# EAGLE board superH_rev4_release (EAGLE 7.6.0), part 1 of 3
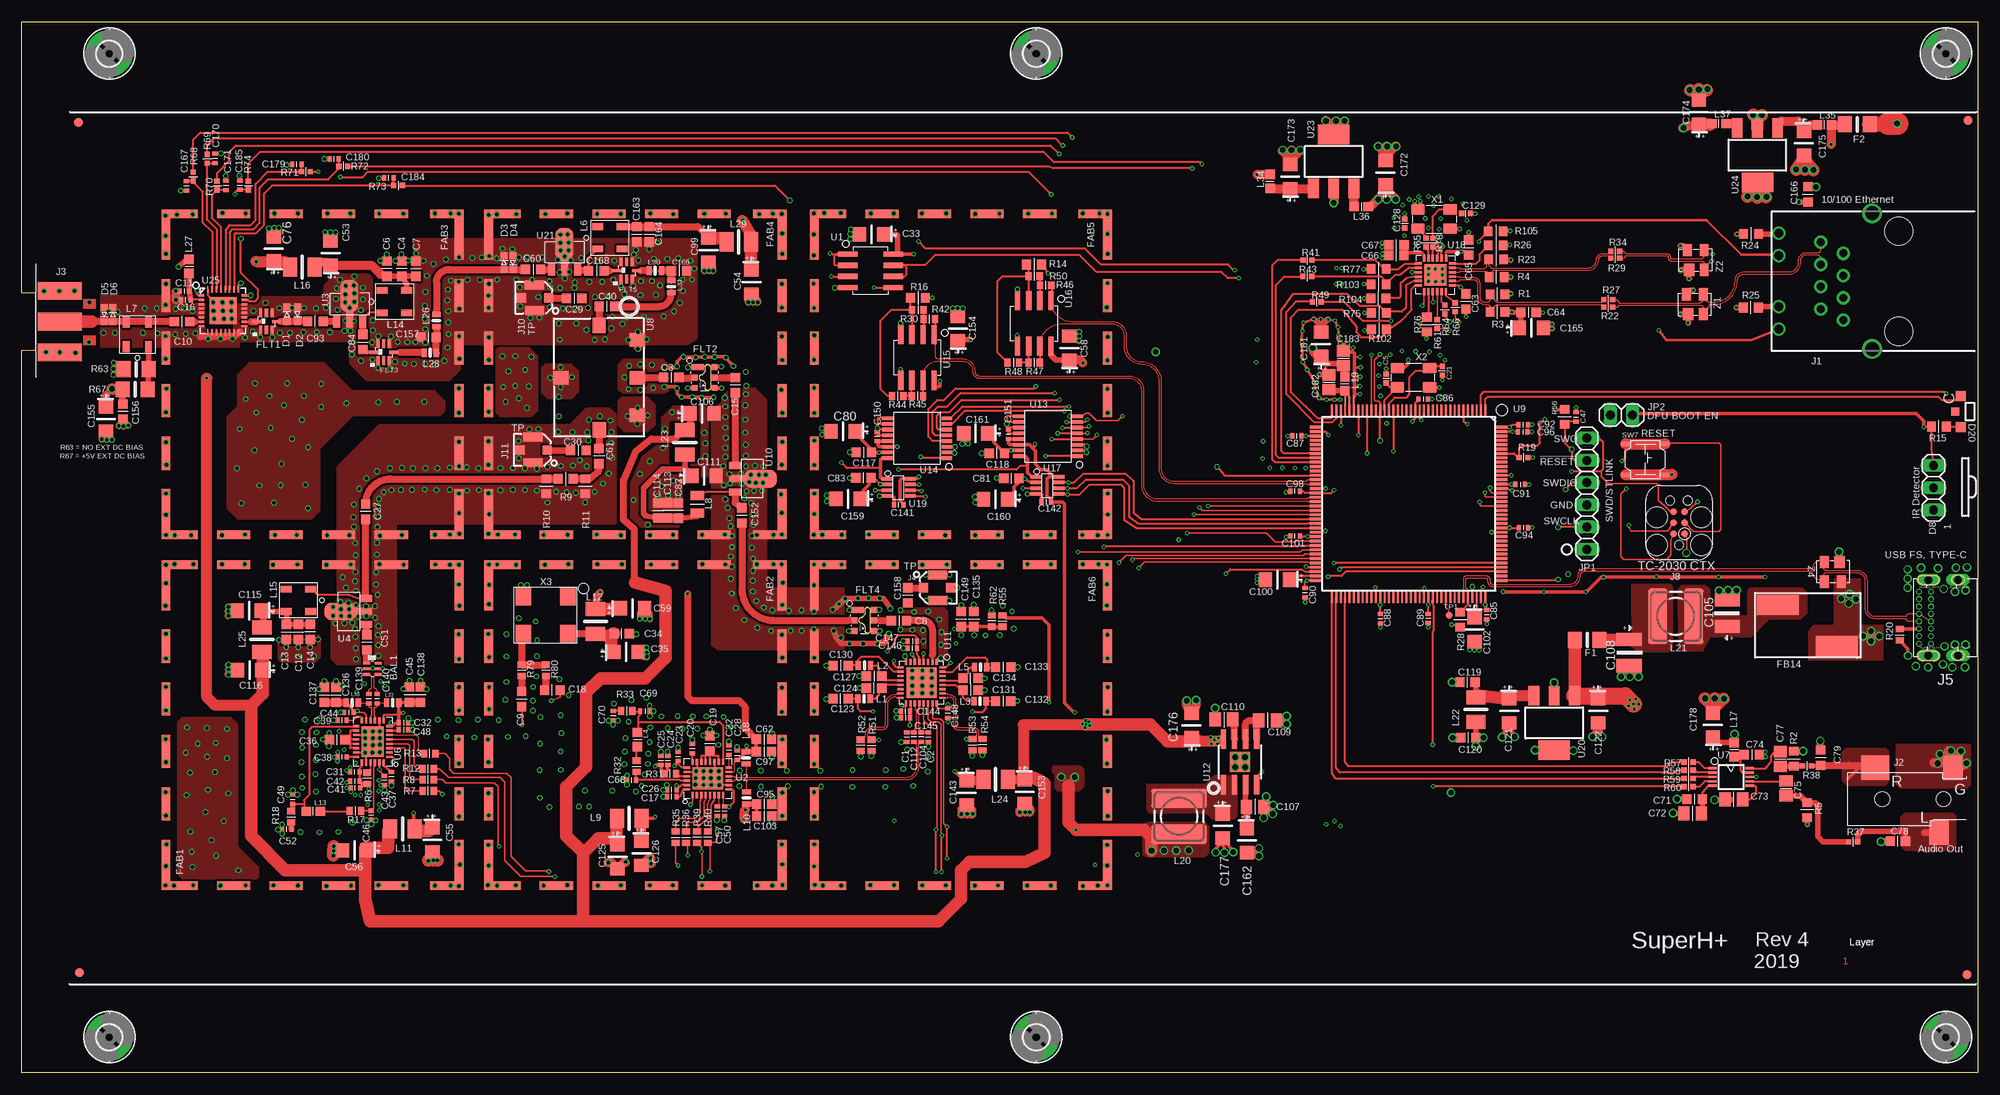
[diagram p0: board, top side]
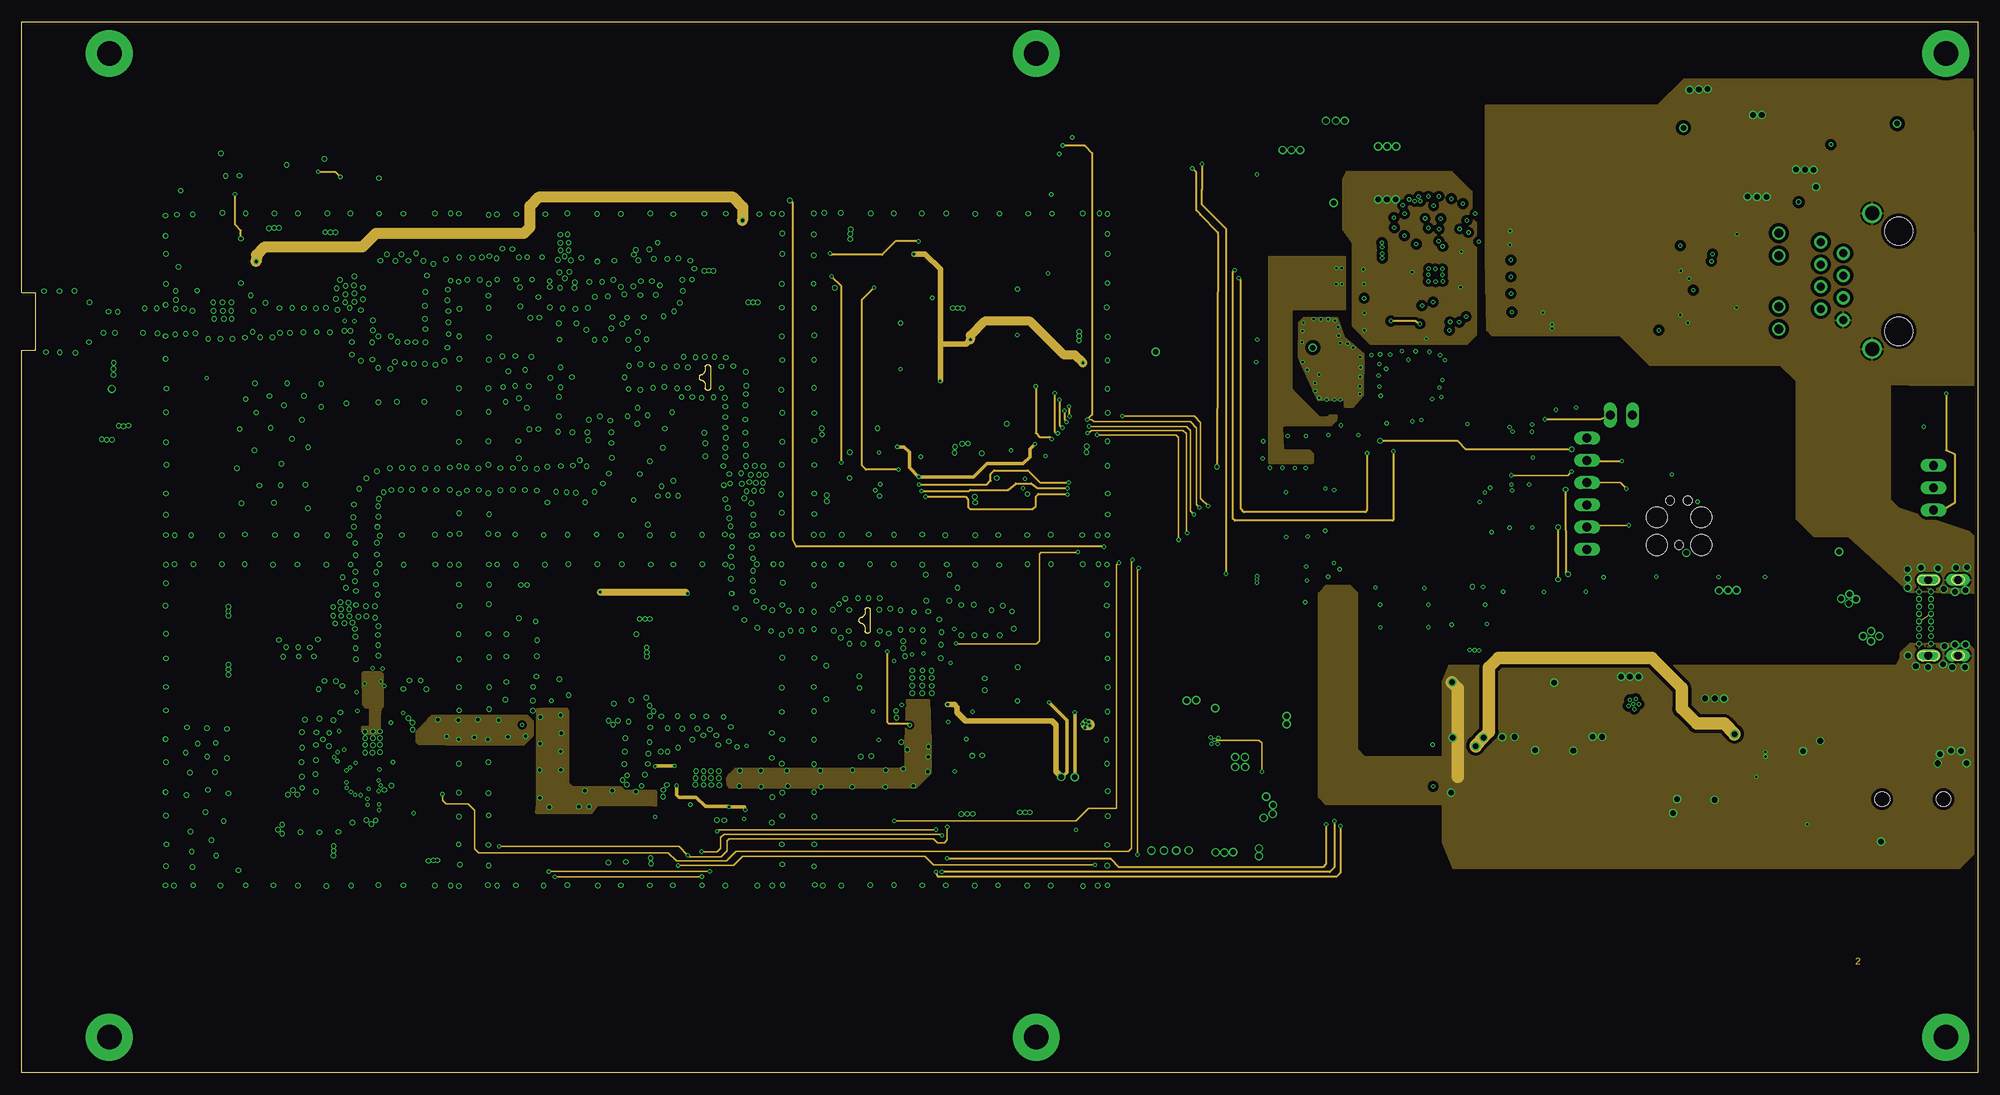
[diagram p1: board, inner layer Route2]
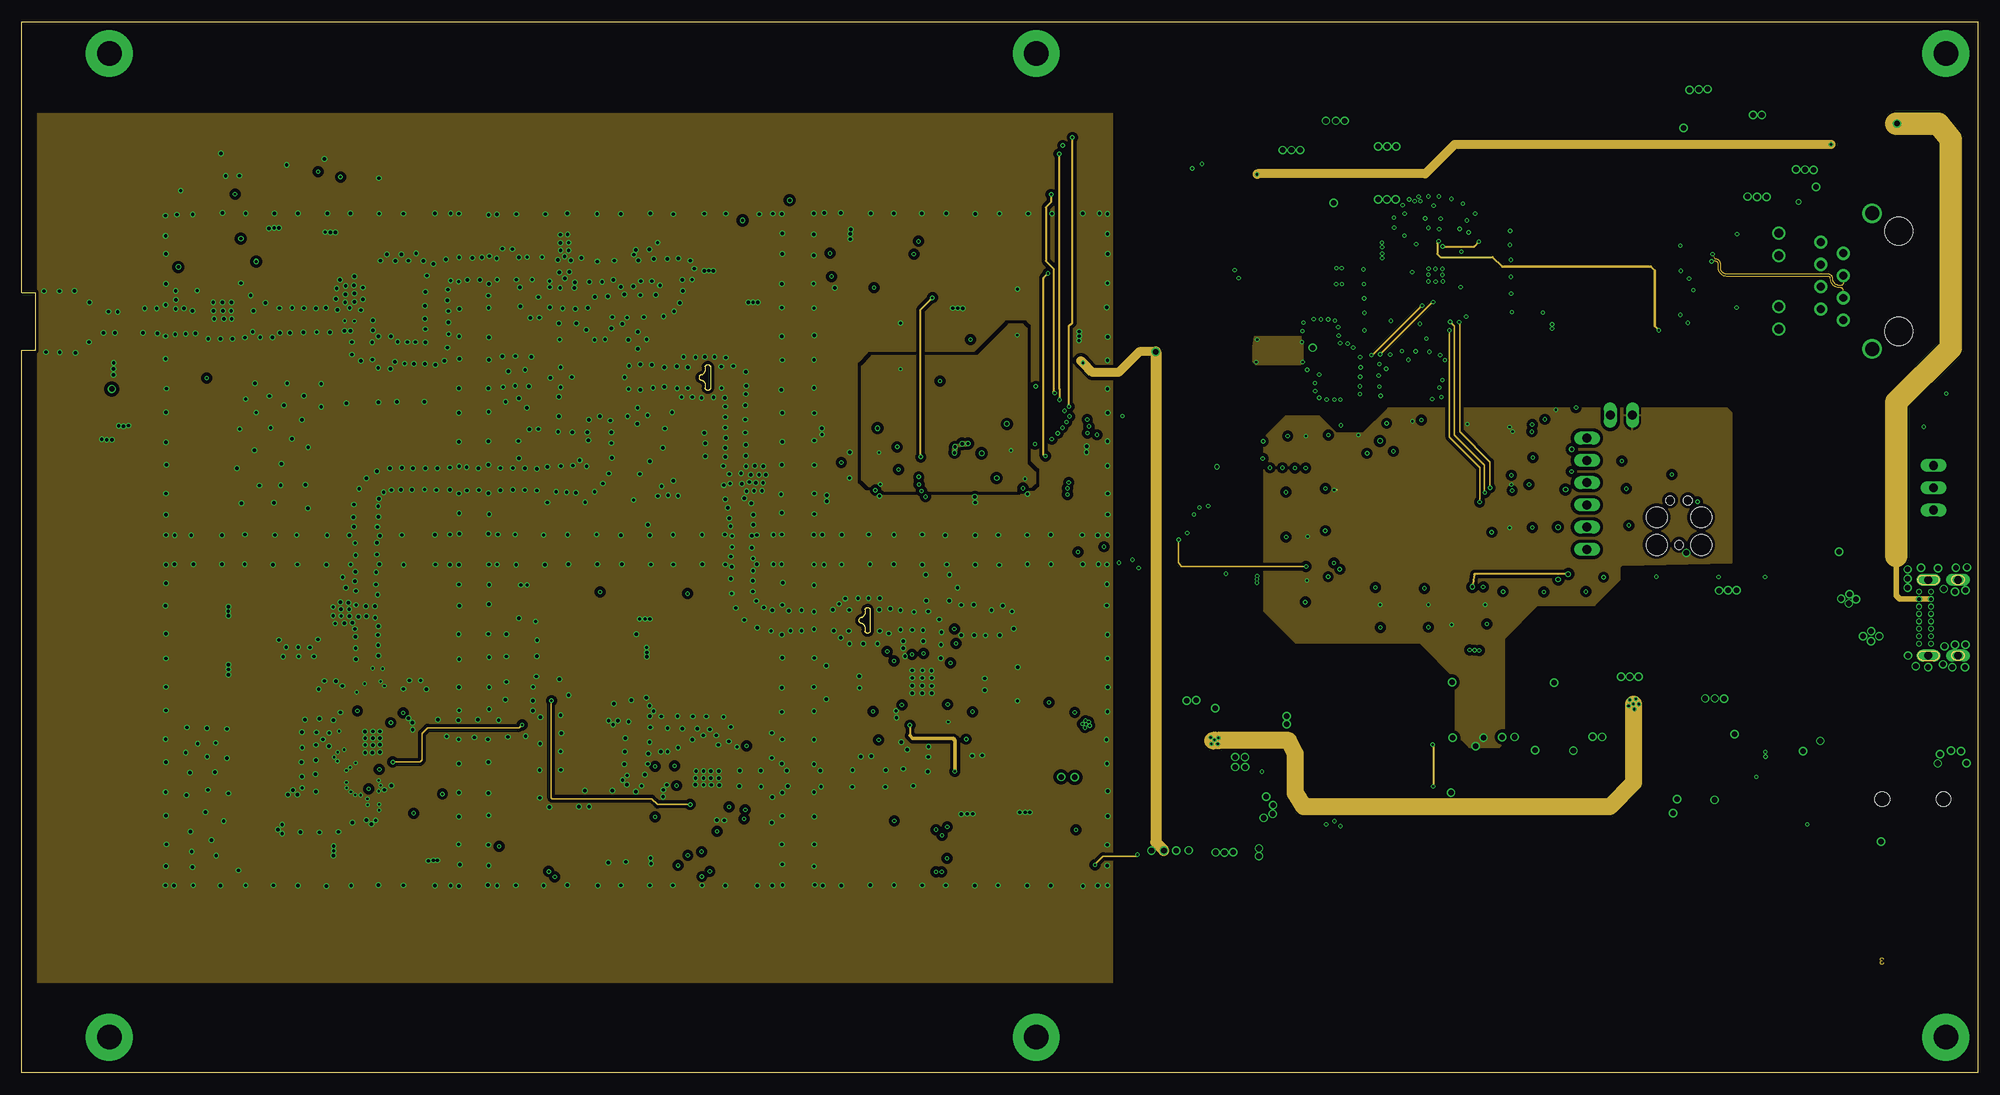
[diagram p2: board, inner layer Route3]
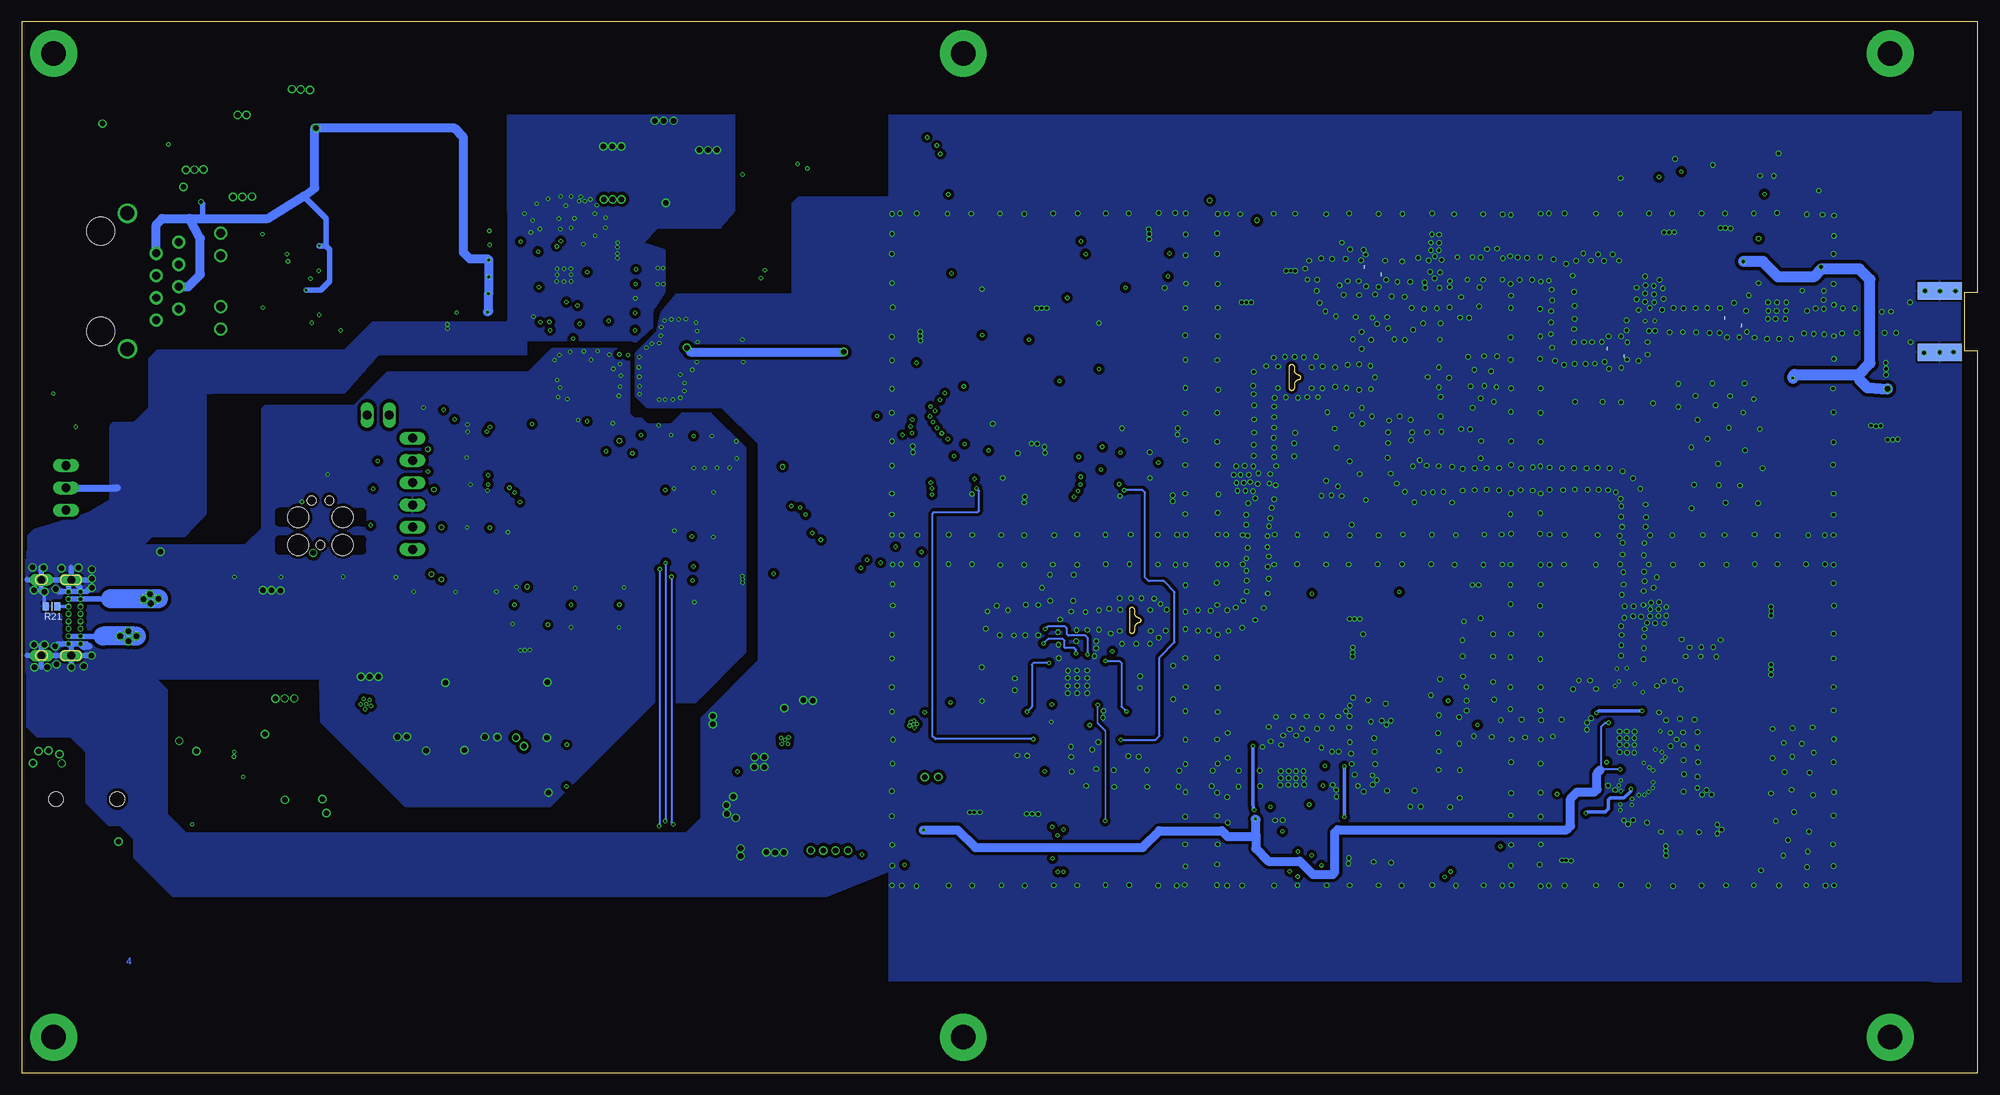
[diagram p3: board, bottom side, seen from below]

Size 223.26 x 120 mm. Coordinates in mm from the lower left corner, seen from the top.
Outline: 0,120 223.26,120 223.26,0 0,0 0,82.47 1.55,82.47 1.55,89.08 0,89.08 0,120
Copper layers (1+2+3+16): Top 0.035mm / dielectric 0.2mm / Route2 0.035mm / dielectric 0.15mm / Route3 0.035mm / dielectric 0.2mm / Bottom 0.035mm
Design rules "default *": minimum track width 5mil, minimum drill 10mil, track to track 5mil, track to pad 5mil, pad to pad 5mil, via to via 5mil, smd to smd 0mil, copper to edge 10mil, drill to drill 10mil, minimum pad ring 4.5mil, minimum via ring 4.5mil, stop-mask expansion 0mil, vias tented up to drill 50mil, thermal gap 10mil
Net classes: 1 differential: width 0.127 mm, clearance 0.127 mm
tRestrict: area 42,86.1 to 43.1,89.7; area 40.5,87.4 to 44.6,88.8; area 62.7,87.9 to 63.3,89; area 58,91.2 to 58.7,92.3; area 80.9,78.2 to 82,78.8; area 73.8,78.9 to 74.4,80; area 38.7,63.8 to 39.8,64.5; area 65.4,70.1 to 66.5,70.7; area 61.7,67.3 to 62.4,68.4; area 30.8,52.1 to 32.3,55.9; area 29.5,53.1 to 33.8,54.8; area 63.2,70.6 to 63.9,71.6; 43 more areas
bRestrict: area 5.5,109.8 to 223.1,118.6; area 5.4,1.2 to 223,10

## Footprints (pad centres in the part's own frame; a part is rotated, then mirrored left to right if it is on the bottom)
TDK_BALUN_5PIN = smd 0.3 x 0.8: 1 -0.635,-0.66; 2 0.015,-0.66; 3 0.665,-0.66; 4 0.665,0.64; 5 0.015,0.64; 6 -0.635,0.64
C0402 = smd 0.457 x 0.61: 1 -0.549,0; 2 0.524,0
C0603 = smd 1.05 x 1.08: 1 -0.875,0; 2 0.875,0
C0402' = smd 0.6 x 0.6: 1 -0.5,0; 2 0.501,0
1210K = smd 1.5 x 1.651: A -1.119,0; C 1.627,0
0402 = smd 0.457 x 0.61: 1 -0.524,0; 2 0.549,0
C0805 = smd 1.3 x 1.6: 1 -1,0; 2 1,0
C0805' = smd 1.3 x 1.5: 1 -0.85,0; 2 0.85,0
1210K' = smd 1.5 x 2.9: A -1.5,0; C 1.5,0
SC-79_PINDIODE = smd 0.813 x 0.813: A -0.813,-0.025; C 0.787,-0.025
1X03 = drill 1.016 long: 1 -2.54,0; 2 0,0; 3 2.54,0
LED-APA3010_1PRIMARY = smd 1.143 x 1.143: 1 -1.854,-0.051; 2 1.651,-0.051 | smd 0.889 x 0.889: 3 -0.102,-0.711
R1206 = smd 1.6 x 1.803: 1 -1.422,0; 2 1.422,0
RF_SHIELD = smd 5.72 x 1: P$1 -15.56,-16.51; P$6 16.36,-16.51; P$7 -15.56,16.97; P$12 16.36,16.97 | smd 3.8 x 1: P$2 -8.59,-16.51; P$3 -2.59,-16.51; P$4 3.41,-16.51; P$5 9.41,-16.51; P$8 -8.59,16.97; P$9 -2.59,16.97; P$10 3.41,16.97; P$11 9.41,16.97 | smd 1 x 3.14: P$13 -17.92,-14.44; P$19 18.72,-14.44 | smd 1 x 3.8: P$14 -17.92,-8.77; P$15 -17.92,-2.77; P$16 -17.92,3.23; P$17 -17.92,9.23; P$20 18.72,-8.77; P$21 18.72,-2.77; P$22 18.72,3.23; P$23 18.72,9.23 | smd 1 x 2.8: P$18 -17.92,15.07; P$24 18.72,15.07
SMB2.5-2 = smd 4.8 x 2.3: P$1 -3.364,2.416; P$2 3.336,-2.284
FIDUCIAL = smd 1.016 x 1.016: 1 0,0
LPF_0868LP15A020 = smd 0.35 x 1: 1 0.7,0.9; 2 0.05,0.9; 3 -0.6,0.9; 5 -0.6,-1.05; 6 0.05,-1.05; 7 0.7,-1.05 | smd 1 x 0.35: 4 -1.1,-0.05; 8 1.2,-0.05
SM3030-6 = smd 1.5 x 0.6: 1 -0.725,1.175 | smd 0.75 x 0.6: 2 -1.1,-0.025; 3 -1.1,-1.2; 4 1.15,-1.2; 5 1.15,-0.025; 6 1.15,1.175
2,8-PAD = drill 2.8 pad 5.334: B2,8 0,0
SI-50170 = drill 0.9 pad 1.5: 1 4.445,5.842; 2 3.175,3.302; 3 1.905,5.842; 4 0.635,3.302; 5 -0.635,5.842; 6 -1.905,3.302; 7 -3.175,5.842; 8 -4.445,3.302 | drill 1.016 pad 1.5: A1 -5.461,10.668; A2 2.921,10.668; C1 -2.921,10.668; C2 5.461,10.668 | drill 1.6 pad 2.2: S1 -7.747,0; S2 7.747,0 | hole 3.251: -5.715,-3.048; 5.715,-3.048
SJ-3523 = smd 2.2 x 2.8: G 8.1,3.6; L 6.5,-3.8 | smd 3.2 x 2.8: R -0.8,3.6 | hole 1.7: 0,0; 7,0
SMA_EDGE = smd 2 x 5: GND@1 8,0; GND@3 1,0 | smd 2 x 5 bottom: GND@2 8,0; GND@4 1,0 | smd 2.1 x 5: RF 4.5,0
UFLCONNECTOR = smd 2.2 x 1: 1 0.01,-1.46; 2 -0.01,1.46 | smd 1.05 x 1.05: 3 -1.5,0; RF 1.6,0
GCT_PN_USB4085 = drill 0.4 pad 0.65: A1 -3,2.812; A4 -2.15,2.812; A5 -1.3,2.812; A6 -0.45,2.812; A7 0.4,2.812; A8 1.25,2.812; A9 2.1,2.812; A12 2.95,2.812; B1 2.95,1.458; B4 2.1,1.458; B5 1.25,1.458; B6 0.4,1.458; B7 -0.45,1.458; B8 -1.3,1.458; B9 -2.15,1.458; B12 -2.995,1.46 | drill 0.9 long: GND@1 -4.35,1.75; GND@2 -4.35,-1.63; GND@3 4.3,1.75; GND@4 4.3,-1.63
TC2030-IDC = smd 0.787 x 0.787: 1 -1.27,-0.635; 2 -1.27,0.635; 3 0,-0.635; 4 0,0.635; 5 1.27,-0.635; 6 1.27,0.635 | hole 2.375: -2.54,2.54; 0.635,2.54; 0.635,-2.54; -2.54,-2.54 | hole 1.016: -2.54,0; 2.54,1.016; 2.54,-1.016
1X06 = drill 1.016 long: 1 -6.35,0; 2 -3.81,0; 3 -1.27,0; 4 1.27,0; 5 3.81,0; 6 6.35,0
1X02 = drill 1.016 long: 1 -1.27,0; 2 1.27,0
MURATA_LQW_0603 = smd 0.6 x 1: 1 -0.7,0; 2 0.7,0
0603 = smd 1.067 x 1.067: 1 -0.9,0; 2 0.7,0
TCCH-80+ = smd 0.762 x 1.27: 1 -1.27,1.524; 2 1.27,1.524; 3 1.27,-1.27; 4 -1.27,-1.27
L2012C = smd 1 x 1.55: 1 -1,0; 2 1,0
L3225M = smd 1.6 x 2.2: 1 -1.4,0; 2 1.4,0
POWER-CHOKE_WE-TPC = smd 6.3 x 2.2: 1 0,2.05; 2 0,-2.05
R0603 = smd 1 x 1.1: 1 -0.85,0; 2 0.85,0
R0402 = smd 0.7 x 0.9: 1 -0.65,0; 2 0.65,0
R0603_COMPACT = smd 0.7 x 0.9: 1 -0.65,0; 2 0.65,0
R0402' = smd 0.6 x 0.6: 1 -0.5,0; 2 0.5,0
PBUT_SW_TACTILE_4_5MMX4_5MM = smd 1 x 0.5: 1 -2.2,1.7; 2 2.3,1.7; 3 -2.2,-1.8; 4 2.3,-1.8
TP08R = smd 0.8 x 0.8: TP 0,0
SO08 = smd 0.6 x 2.2: 1 -1.905,-2.6; 2 -0.635,-2.6; 3 0.635,-2.6; 4 1.905,-2.6; 5 1.905,2.6; 6 0.635,2.6; 7 -0.635,2.6; 8 -1.905,2.6
QFN28_NONSQ = smd 0.25 x 0.7: 1 -1.75,-1.9; 2 -1.25,-1.9; 3 -0.75,-1.9; 4 -0.25,-1.9; 5 0.25,-1.9; 6 0.75,-1.9; 7 1.25,-1.9; 8 1.75,-1.9; 15 1.75,1.9; 16 1.25,1.9; 17 0.75,1.9; 18 0.25,1.9; 19 -0.25,1.9; 20 -0.75,1.9; 21 -1.25,1.9; 22 -1.75,1.9 | smd 0.7 x 0.25: 9 2.4,-1.25; 10 2.4,-0.75; 11 2.4,-0.25; 12 2.4,0.25; 13 2.4,0.75; 14 2.4,1.25; 23 -2.4,1.25; 24 -2.4,0.75; 25 -2.4,0.25; 26 -2.4,-0.25; 27 -2.4,-0.75; 28 -2.4,-1.25 | smd 3.5 x 2.5: GPAD 0,0
SOT89 = smd 0.8 x 1.4: 1 -1.474,-2.768; 3 1.524,-2.768 | smd 0.8 x 1.9: 2 0.025,-2.514 | smd 2.032 x 3.65: 2@1 0.025,0.153
MSOP10 = smd 0.25 x 1: 1 -1,-2.113; 2 -0.5,-2.113; 3 0,-2.113; 4 0.5,-2.113; 5 1,-2.113; 6 1,2.113; 7 0.5,2.113; 8 0,2.113; 9 -0.5,2.113; 10 -1,2.113
SYM-18H = smd 1.778 x 1.524: 1 5.969,0.025; 2 -5.969,0 | smd 1.524 x 1.778: 3 0,-4.369; 4 0,4.394; 5 -4.318,-4.369; 6 4.318,-4.369
STM32F407_144 = smd 1.35 x 0.32: 1 -10.625,8.75; 2 -10.625,8.25; 3 -10.625,7.75; 4 -10.625,7.25; 5 -10.625,6.75; 6 -10.625,6.25; 7 -10.625,5.75; 8 -10.625,5.25; 9 -10.625,4.75; 10 -10.625,4.25; 11 -10.625,3.75; 12 -10.625,3.25; 13 -10.625,2.75; 14 -10.625,2.25; 15 -10.625,1.75; 16 -10.625,1.25; 17 -10.625,0.75; 18 -10.625,0.25; 19 -10.625,-0.25; 20 -10.625,-0.75; 21 -10.625,-1.25; 22 -10.625,-1.75; 23 -10.625,-2.25; 24 -10.625,-2.75; 25 -10.625,-3.25; 26 -10.625,-3.75; 27 -10.625,-4.25; 28 -10.625,-4.75; 29 -10.625,-5.25; 30 -10.625,-5.75; 31 -10.625,-6.25; 32 -10.625,-6.75; 33 -10.625,-7.25; 34 -10.625,-7.75; 35 -10.625,-8.25; 36 -10.625,-8.75; 73 10.625,-8.75; 74 10.625,-8.25; 75 10.625,-7.75; 76 10.625,-7.25; 77 10.625,-6.75; 78 10.625,-6.25; 79 10.625,-5.75; 80 10.625,-5.25; 81 10.625,-4.75; 82 10.625,-4.25; 83 10.625,-3.75; 84 10.625,-3.25; 85 10.625,-2.75; 86 10.625,-2.25; 87 10.625,-1.75; 88 10.625,-1.25; 89 10.625,-0.75; 90 10.625,-0.25; 91 10.625,0.25; 92 10.625,0.75; 93 10.625,1.25; 94 10.625,1.75; 95 10.625,2.25; 96 10.625,2.75; 97 10.625,3.25; 98 10.625,3.75; 99 10.625,4.25; 100 10.625,4.75; 101 10.625,5.25; 102 10.625,5.75; 103 10.625,6.25; 104 10.625,6.75; 105 10.625,7.25; 106 10.625,7.75; 107 10.625,8.25; 108 10.625,8.75 | smd 0.32 x 1.35: 37 -8.75,-10.625; 38 -8.25,-10.625; 39 -7.75,-10.625; 40 -7.25,-10.625; 41 -6.75,-10.625; 42 -6.25,-10.625; 43 -5.75,-10.625; 44 -5.25,-10.625; 45 -4.75,-10.625; 46 -4.25,-10.625; 47 -3.75,-10.625; 48 -3.25,-10.625; 49 -2.75,-10.625; 50 -2.25,-10.625; 51 -1.75,-10.625; 52 -1.25,-10.625; 53 -0.75,-10.625; 54 -0.25,-10.625; 55 0.25,-10.625; 56 0.75,-10.625; 57 1.25,-10.625; 58 1.75,-10.625; 59 2.25,-10.625; 60 2.75,-10.625; 61 3.25,-10.625; 62 3.75,-10.625; 63 4.25,-10.625; 64 4.75,-10.625; 65 5.25,-10.625; 66 5.75,-10.625; 67 6.25,-10.625; 68 6.75,-10.625; 69 7.25,-10.625; 70 7.75,-10.625; 71 8.25,-10.625; 72 8.75,-10.625; 109 8.75,10.625; 110 8.25,10.625; 111 7.75,10.625; 112 7.25,10.625; 113 6.75,10.625; 114 6.25,10.625; 115 5.75,10.625; 116 5.25,10.625; 117 4.75,10.625; 118 4.25,10.625; 119 3.75,10.625; 120 3.25,10.625; 121 2.75,10.625; 122 2.25,10.625; 123 1.75,10.625; 124 1.25,10.625; 125 0.75,10.625; 126 0.25,10.625; 127 -0.25,10.625; 128 -0.75,10.625; 129 -1.25,10.625; 130 -1.75,10.625; 131 -2.25,10.625; 132 -2.75,10.625; 133 -3.25,10.625; 134 -3.75,10.625; 135 -4.25,10.625; 136 -4.75,10.625; 137 -5.25,10.625; 138 -5.75,10.625; 139 -6.25,10.625; 140 -6.75,10.625; 141 -7.25,10.625; 142 -7.75,10.625; 143 -8.25,10.625; 144 -8.75,10.625
QFN32 = smd 0.25 x 0.7: 1 -1.75,-2.38; 2 -1.25,-2.38; 3 -0.75,-2.38; 4 -0.25,-2.38; 5 0.25,-2.38; 6 0.75,-2.38; 7 1.25,-2.38; 8 1.75,-2.38; 17 1.75,2.39; 18 1.25,2.39; 19 0.75,2.39; 20 0.25,2.39; 21 -0.25,2.39; 22 -0.75,2.39; 23 -1.25,2.39; 24 -1.75,2.39 | smd 0.7 x 0.25: 9 2.4,-1.75; 10 2.4,-1.25; 11 2.4,-0.75; 12 2.4,-0.25; 13 2.4,0.25; 14 2.4,0.75; 15 2.4,1.25; 16 2.4,1.75; 25 -2.4,1.75; 26 -2.4,1.25; 27 -2.4,0.75; 28 -2.4,0.25; 29 -2.4,-0.25; 30 -2.4,-0.75; 31 -2.4,-1.25; 32 -2.4,-1.75 | smd 3.45 x 3.45: GPAD 0,0
SO8 = smd 0.6 x 2.2: 1 -1.905,-2.62; 2 -0.635,-2.62; 3 0.635,-2.62; 4 1.905,-2.62; 5 1.905,2.58; 6 0.635,2.58; 7 -0.635,2.58; 8 -1.905,2.58 | smd 2.29 x 2.29: GPAD 0,0
SSOP16 = smd 0.42 x 1.25: 1 -2.25,-3.35; 2 -1.6,-3.35; 3 -0.95,-3.35; 4 -0.3,-3.35; 5 0.35,-3.35; 6 1,-3.35; 7 1.65,-3.35; 8 2.3,-3.35; 9 2.3,3.394; 10 1.65,3.394; 11 1,3.394; 12 0.35,3.394; 13 -0.3,3.394; 14 -0.95,3.394; 15 -1.6,3.394; 16 -2.25,3.394
TSOT-23-8 = smd 0.4 x 1.22: 1 -1,-1.3; 2 -0.35,-1.3; 3 0.3,-1.3; 4 0.95,-1.3; 5 0.95,1.35; 6 0.3,1.35; 7 -0.35,1.35; 8 -1,1.35
QFN-24 = smd 0.28 x 0.8: 1 -1.205,-1.836; 2 -0.705,-1.836; 3 -0.205,-1.836; 4 0.295,-1.836; 5 0.795,-1.836; 6 1.295,-1.836; 13 1.3,2.03; 14 0.8,2.03; 15 0.3,2.03; 16 -0.2,2.03; 17 -0.7,2.03; 18 -1.2,2.03 | smd 0.8 x 0.28: 7 1.94,-1.191; 8 1.94,-0.691; 9 1.94,-0.191; 10 1.94,0.309; 11 1.94,0.809; 12 1.94,1.309; 19 -1.929,1.3; 20 -1.929,0.8; 21 -1.929,0.3; 22 -1.929,-0.2; 23 -1.929,-0.7; 24 -1.929,-1.2 | smd 2.5 x 2.5: GP 0,0.1
SOT223 = smd 1.219 x 2.235: 1 -2.311,-3.099; 2 0,-3.099; 3 2.311,-3.099 | smd 3.6 x 2.2: 4 0,3.099
QFN32' = smd 0.7 x 0.25: 1 -2.473,1.795; 2 -2.473,1.295; 3 -2.473,0.795; 4 -2.473,0.295; 5 -2.473,-0.205; 6 -2.473,-0.705; 7 -2.473,-1.205; 8 -2.473,-1.705; 17 2.427,-1.705; 18 2.427,-1.205; 19 2.427,-0.705; 20 2.427,-0.205; 21 2.427,0.295; 22 2.427,0.795; 23 2.427,1.295; 24 2.427,1.795 | smd 0.25 x 0.7: 9 -1.773,-2.405; 10 -1.273,-2.405; 11 -0.773,-2.405; 12 -0.273,-2.405; 13 0.227,-2.405; 14 0.727,-2.405; 15 1.227,-2.405; 16 1.727,-2.405; 25 1.727,2.495; 26 1.227,2.495; 27 0.727,2.495; 28 0.227,2.495; 29 -0.273,2.495; 30 -0.773,2.495; 31 -1.273,2.495; 32 -1.773,2.495 | smd 3.1 x 3.1: 33 -0.023,0.045
ECS-250-20-30B-DU_CRYSTAL = smd 1.6 x 1.25: 1 -1.9,-1.1; 3 1.8,1.1; GND@1 -1.9,1.1; GND@2 1.8,-1.1
CWX8XX_5MM_7MM = smd 1.8 x 2: 1 -2.5,-2.1; 2 2.58,-2.1; 3 2.58,2.1; 4 -2.5,2.1
SR2.8.TCT_1PRIMARY = smd 1.397 x 1.194: 1 -1.168,0.813 | smd 1.397 x 0.991: 2 -1.168,-0.914; 3 1.067,-0.914; 4 1.067,1.016

## Placement (x,y rotation side)
BAL1  HHM17147A1  [TDK_BALUN_5PIN]  40,46.15 270 top
C1  DNP  [C0402]  101.02,38.33 90 top
C2  DNP  [C0402]  103.48,38.33 90 top
C3  330pF  [C0603]  74.12,79.4 0 top
C4  1000pF  [C0603]  43.36,91.82 270 top
C5  10pF  [C0402']  155.75,79.27 270 top
C6  18pF  [C0603]  41.68,91.82 270 top
C7  2.2uF  [C0603]  44.98,91.82 90 top
C8  330pF  [C0603]  100.13,51.64 0 top
C9  1uF  [C0603]  57.05,42.67 90 top
C10  1000pF  [C0603]  18.29,85.78 180 top
C11  0.1uF  [C0402]  18.57,89.26 180 top
C12  1000pF  [C0603]  31.55,50.34 90 top
C13  330pF  [C0603]  30.2,50.34 90 top
C14  2.2uF  [C0603]  32.92,50.34 270 top
C15  330pF  [C0603]  81.43,78.51 270 top
C16  1000pF  [C0402]  18.69,88.27 180 top
C17  1uF  [C0402]  74.17,31.52 180 top
C18  1uF  [C0603]  60.55,43.71 180 top
C19  2.2uF  [C0603]  78.54,37.62 90 top
C20  1uF  [C0402]  76.56,37.03 90 top
C21  10pF  [C0402']  162.15,80.16 90 top
C22  1uF  [C0402]  80.7,36.86 90 top
C23  0.012uF  [C0402]  74.9,36.15 90 top
C24  18pF  [C0402]  73.74,35.69 90 top
C25  1uF  [C0402]  72.95,35.69 90 top
C26  0.1uF  [C0402]  74.17,32.34 180 top
C27  330pF  [C0603]  39.24,64.09 270 top
C28  0.012uF  [C0402]  81.66,36.27 90 top
C29  DNP  [C0603]  63.04,88.44 0 top
C30  DNP  [C0603]  63.53,71.07 0 top
C31  0.012uF  [C0402]  38,34.37 180 top
C32  0.1uF  [C0402]  43.59,39.98 0 top
C33  TLJA107M006R0500_100uF_6.3V  [1210K]  97.26,95.73 180 top
C34  330pF  [C0603]  68.48,50.14 180 top
C35  TLJA107M006R0500_100uF_6.3V  [1210K]  68.71,48.06 0 top
C36  2.2uF  [C0603]  35.99,38.05 180 top
C37  1uF  [C0402]  42.19,33.81 270 top
C38  1uF  [C0402]  36.55,36.07 180 top
C39  1uF  [C0402]  36.55,40.26 180 top
C40  1000pF  [C0603]  66.78,87.5 0 top
C41  18pF  [C0402]  38.05,32.54 180 top
C42  1uF  [C0402]  38.02,33.3 180 top
C43  0.1uF  [C0402]  41.4,33.38 270 top
C44  0.012uF  [C0402]  37.34,41.15 180 top
C45  1uF  [C0603]  44.22,43.18 90 top
C46  120pF  [C0402]  39.88,29.39 270 top
C47  1uF  [0402]  177.42,74.88 90 top
C48  0.1uF  [C0402]  43.59,39.17 0 top
C49  120pF  [C0402]  30.91,31.24 90 top
C50  0.1uF  [C0402]  80.21,29.85 270 top
C51  330pF  [C0603]  39.37,49.15 270 top
C52  470pF  [C0402]  30.23,27.81 180 top
C53  TLJA107M006R0500_100uF_6.3V  [1210K]  35.24,93.33 90 top
C54  TLJA107M006R0500_100uF_6.3V  [1210K]  83.29,90.55 270 top
C55  TLJA107M006R0500_100uF_6.3V  [1210K]  46.86,26.87 270 top
C56  TLJA107M006R0500_100uF_6.3V  [1210K]  38.25,25.4 180 top
C57  0.1uF  [C0402]  79.38,29.85 270 top
C58  TLJA107M006R0500_100uF_6.3V  [1210K]  119.58,82.5 90 top
C59  TLJA107M006R0500_100uF_6.3V  [1210K]  69.47,53.04 0 top
C60  1000pF  [C0603]  58.34,91.72 0 top
C61  330pF  [C0603]  65.89,70.41 270 top
C62  2.2uF  [C0603]  84.71,38.08 0 top
C63  0.1uF  [C0603]  164.85,88.06 270 top
C64  0.1uF  [C0603]  171.98,86.82 0 top
C65  0.1uF  [C0603]  165.18,94.23 90 top
C66  1uF  [C0603]  156.9,93.32 180 top
C67  330pF  [C0603]  156.92,94.51 180 top
C68  120pF  [C0402]  69.6,33.43 180 top
C69  120pF  [C0402]  71.12,41.28 0 top
C70  470pF  [C0402]  67.54,40.77 270 top
C71  0.1uF  [C0603]  190.96,31.27 180 top
C72  10uF  [C0805]  190.73,29.64 180 top
C73  10uF  [C0805]  195.43,31.22 0 top
C74  0.1uF  [C0603]  197.49,36.32 0 top
C75  2.2uF  [C0805']  201.4,32.49 90 top
C76  TLJA107M006R0500_100uF_6.3V  [1210K]  28.75,93.83 90 top
C77  2.2uF  [C0805']  200.76,35.84 90 top
C78  8200pF  [C0603]  214.17,26.44 180 top
C79  8200pF  [C0603]  205.36,35.99 90 top
C80  100uF  [1210K]  94.01,73.25 180 top
C81  1000pF  [C0603]  112.95,67.9 180 top
C82  1000pF  [C0603]  74.93,64.19 270 top
C83  1000pF  [C0603]  96.06,67.95 180 top
C84  1000pF  [C0603]  38.91,83.44 90 top
C85  0.1uF  [0402]  167.23,52.3 270 top
C86  0.1uF  [0402]  159.94,76.94 0 top
C87  0.1uF  [0402]  145.57,72.72 180 top
C88  0.1uF  [0402]  155.09,51.87 270 top
C89  0.1uF  [0402]  160.55,51.89 270 top
C90  0.1uF  [0402]  146.48,54.81 270 top
C91  0.1uF  [0402]  171.04,67.18 0 top
C92  0.1uF  [0402]  171.35,73.99 0 top
C93  1000pF  [C0603]  33.5,85.83 180 top
C94  0.1uF  [0402]  171.4,62.26 0 top
C95  2.2uF  [C0603]  84.73,30.68 0 top
C96  0.1uF  [0402]  171.32,73.18 0 top
C97  18pF  [C0603]  84.71,36.68 0 top
C98  0.1uF  [0402]  145.36,66.42 180 top
C99  TLJA107M006R0500_100uF_6.3V  [1210K]  78.38,94.18 270 top
C100  TLJA107M006R0500_100uF  [1210K]  143.59,56.31 180 top
C101  0.1uF  [0402]  145.36,61.29 180 top
C102  TLJA107M006R0500_100uF  [1210K]  165.84,50.85 270 top
C103  18pF  [C0603]  84.73,29.29 0 top
C104  1000pF  [C0402]  102.69,38.33 270 top
C105  TLJA107M006R0500_100uF_6.3V  [1210K']  194.69,52.48 90 top
C106  TLJA107M006R0500_100uF_6.3V  [1210K]  77.39,75.29 0 top
C107  2.2uF  [C0805]  140.79,30.38 0 top
C108  TLJA107M006R0500_100uF_6.3V  [1210K']  183.49,47.98 270 top
C109  2.2uF  [C0805]  142.21,40.26 0 top
C110  2.2uF  [C0805]  137.24,40.34 180 top
C111  TLJA107M006R0500_100uF_6.3V  [1210K]  77.62,68.17 0 top
C112  1000pF  [C0402]  101.8,38.33 270 top
C113  18pF  [C0603]  73.76,64.21 270 top
C114  2.2uF  [C0603]  72.62,64.21 90 top
C115  TLJA107M006R0500_100uF_6.3V  [1210K]  26.21,52.76 180 top
C116  TLJA107M006R0500_100uF_6.3V  [1210K]  26.26,45.98 180 top
C117  1000pF  [C0603]  96.11,70.84 180 top
C118  1000pF  [C0603]  111.3,70.77 180 top
C119  2.2uF  [C0603]  165.02,44.6 180 top
C120  2.2uF  [C0603]  165.13,38.25 180 top
C121  TLJA107M006R0500_100uF_6.3V  [1210K]  169.8,41.58 270 top
C122  TLJA107M006R0500_100uF_6.3V  [1210K]  179.96,41.58 270 top
C123  1000pF  [C0603]  93.47,42.72 180 top
C124  1000pF  [C0603]  97.28,43.94 180 top
C125  TLJA107M006R0500_100uF_6.3V  [1210K]  68,24.92 270 top
C126  TLJA107M006R0500_100uF_6.3V  [1210K]  70.74,25.3 270 top
C127  1000pF  [C0603]  97.28,45.29 0 top
C128  10pF  [C0402']  157.86,96.98 270 top
C129  10pF  [C0402']  164.87,98.12 180 top
C130  1000pF  [C0603]  93.47,46.51 0 top
C131  1000pF  [C0603]  108.31,43.71 0 top
C132  1000pF  [C0603]  112.01,42.42 0 top
C133  1000pF  [C0603]  112.04,46.33 180 top
C134  1000pF  [C0603]  108.31,45.04 180 top
C135  2.2uF  [C0603]  108.69,51.82 90 top
C136  1uF  [C0603]  35.86,43.16 90 top
C137  18pF  [C0603]  34.52,43.16 90 top
C138  18pF  [C0603]  45.52,43.18 90 top
C139  1000pF  [C0402]  39.6,42.75 90 top
C140  1000pF  [C0402]  40.56,42.72 90 top
C141  2.2uF  [C0402]  100.1,64.85 180 top
C142  2.2uF  [C0402]  116.94,65.2 180 top
C143  TLJA107M006R0500_100uF_6.3V  [1210K]  107.85,32.21 270 top
C144  2.2uF  [C0402]  100.86,41.28 180 top
C145  1000pF  [C0402]  100.89,40.54 0 top
C146  2.2uF  [C0402]  101.65,48.49 180 top
C147  1000pF  [C0402]  101.65,49.3 0 top
C148  2.2uF  [C0402]  105.69,41.05 270 top
C149  18pF  [C0603]  107.21,51.82 90 top
C150  2.2uF  [C0402]  97.66,72.64 270 top
C151  2.2uF  [C0402]  112.62,72.9 270 top
C152  330pF  [C0603]  82.19,63.65 270 top
C153  TLJA107M006R0500_100uF_6.3V  [1210K]  114.48,32.36 270 top
C154  TLJA107M006R0500_100uF_6.3V  [1210K]  106.86,84.74 90 top
C155  TLJA107M006R0500_100uF_6.3V  [1210K]  9.6,74.88 270 top
C156  330pF  [C0603]  11.53,75.49 270 top
C157  4.7pF  [C0603]  46.43,84 180 top
C158  DNP  [C0603]  101.14,54.51 270 top
C159  100uF  [1210K]  94.56,65.53 180 top
C160  100uF  [1210K]  111.4,65.48 180 top
C161  100uF  [1210K]  109.14,73.03 180 top
C162  TLJA107M006R0500_100uF_6.3V  [1210K]  139.85,26.77 270 top
C163  1000pF  [C0603]  70.21,95.76 90 top
C164  330pF  [C0603]  71.65,95.76 90 top
C165  TLJA107M006R0500_100uF  [1210K]  172.06,85.07 0 top
C166  0.1uF  [C0603]  203.89,100.31 90 top
C167  120pF  [C0402]  18.77,101.25 270 top
C168  1000pF  [C0603]  65.58,91.59 0 top
C169  4.7pF  [C0603]  75.01,91.59 0 top
C170  120pF  [C0402]  22.02,104.42 90 top
C171  120pF  [C0402]  23.29,101.35 90 top
C172  TLJA107M006R0500_100uF  [1210K]  155.68,102.54 90 top
C173  TLJA107M006R0500_100uF  [1210K]  144.78,102.08 90 top
C174  TLJA107M006R0500_100uF  [1210K]  191.44,109.42 90 top
C175  TLJA107M006R0500_100uF  [1210K]  203.43,106.38 270 top
C176  TLJA107M006R0500_100uF_6.3V  [1210K]  133.53,39.4 90 top
C177  TLJA107M006R0500_100uF_6.3V  [1210K]  137.11,28.42 270 top
C178  TLJA107M006R0500_100uF_6.3V  [1210K]  193.04,39.45 90 top
C179  120pF  [C0402]  31.37,103.73 180 top
C180  120pF  [C0402]  35.64,104.34 180 top
C181  TLJA107M006R0500_100uF  [1210K]  148.31,82.93 90 top
C182  2.2uF  [C0805']  149.2,78.87 90 top
C183  2.2uF  [C0805']  150.85,81.61 90 top
C184  120pF  [C0402]  41.88,102.19 180 top
C185  120pF  [C0402]  24.89,101.37 90 top
D1  SMP1321-079LFSMD  [SC-79_PINDIODE]  30.23,86.61 90 top
D2  SMP1321-079LFSMD  [SC-79_PINDIODE]  31.5,86.59 270 top
D3  SMP1321-079LFSMD  [SC-79_PINDIODE]  55.02,92.53 90 top
D4  SMP1321-079LFSMD  [SC-79_PINDIODE]  56.08,92.51 270 top
D5  SMP1321-079LFSMD  [SC-79_PINDIODE]  10.36,86.59 90 top
D6  SMP1321-079LFSMD  [SC-79_PINDIODE]  9.42,86.56 270 top
D8  [1X03]  218.24,66.8 90 top
D20  APA3010  [LED-APA3010_1PRIMARY]  221.41,75.41 270 top
F1  0ZCJ0200FF2C  [R1206]  178.69,49.43 0 top
F2  0ZCJ0200FF2C  [R1206]  209.55,108.31 0 top
FAB1  2118724  [RF_SHIELD]  32.94,40.11 270 top
FAB2  2118724  [RF_SHIELD]  69.8,40.11 270 top
FAB3  2118724  [RF_SHIELD]  32.94,80.16 270 top
FAB4  2118724  [RF_SHIELD]  69.8,80.16 270 top
FAB5  2118724  [RF_SHIELD]  106.96,80.16 270 top
FAB6  2118724  [RF_SHIELD]  106.96,40.11 270 top
FB14  SMB2.5R-2  [SMB2.5-2]  203.81,51.13 180 top
FID1  FIDUCIALSMD  [FIDUCIAL]  222.15,108.76 0 top
FID2  FIDUCIALSMD  [FIDUCIAL]  6.45,108.54 0 top
FID3  FIDUCIALSMD  [FIDUCIAL]  222.07,11.2 0 top
FID4  FIDUCIALSMD  [FIDUCIAL]  6.58,11.43 0 top
FLT1  0868LP15A020E  [LPF_0868LP15A020]  27.97,85.73 180 top
FLT2  B39162B3522U410  [SM3030-6]  77.9,79.4 0 top
FLT3  0868LP15A020E  [LPF_0868LP15A020]  41.35,82.22 180 top
FLT4  B39162B3522U410  [SM3030-6]  96.14,51.66 0 top
FLT5  0868LP15A020E  [LPF_0868LP15A020]  69.09,91.54 180 top
H1  MOUNT-PAD-ROUND2.8  [2,8-PAD]  9.97,116.38 0 top
H2  MOUNT-PAD-ROUND2.8  [2,8-PAD]  115.8,116.38 0 top
H3  MOUNT-PAD-ROUND2.8  [2,8-PAD]  115.8,4.06 0 top
H4  MOUNT-PAD-ROUND2.8  [2,8-PAD]  219.63,116.38 0 top
H5  MOUNT-PAD-ROUND2.8  [2,8-PAD]  9.97,4.06 0 top
H6  MOUNT-PAD-ROUND2.8  [2,8-PAD]  219.63,4.06 0 top
J1  SI-50170  [SI-50170]  211.22,90.4 90 top
J2  SJ-3523  [SJ-3523]  212.37,31.24 0 top
J3  SMA0.062  [SMA_EDGE]  4.32,81.28 90 top
J4  AMPHENOL_A-1JB  [UFLCONNECTOR]  104.55,55.4 180 top
J5  USB4085  [GCT_PN_USB4085]  219.41,51.99 90 top
J8  TC2030-CTX  [TC2030-IDC]  189.18,62.82 90 top
J10  AMPHENOL_A-1JB  [UFLCONNECTOR]  58.52,88.49 0 top
J11  AMPHENOL_A-1JB  [UFLCONNECTOR]  58.34,71.12 0 top
JP1  [1X06]  178.67,66.11 90 top
JP2  [1X02]  182.6,75.11 180 top
L1  3.3uH  [MURATA_LQW_0603]  96.14,42.72 180 top
L2  3.3uH  [MURATA_LQW_0603]  96.19,46.51 0 top
L3  3.3uH  [MURATA_LQW_0603]  109.4,42.44 180 top
L4  GLFR1608T220M-LR_22uH  [0603]  70.27,38.16 90 top
L5  3.3uH  [MURATA_LQW_0603]  109.45,46.31 0 top
L6  TCCH-80+  [TCCH-80+]  67.25,95.36 90 top
L7  TCCH-80+  [TCCH-80+]  13.18,84.43 180 top
L8  LQW2BAN36NJ00L_36nH  [L2012C]  77.09,64.92 90 top
L9  LQH32PN1R5NN0L  [L3225M]  69.34,29.06 0 top
L10  LQW18AN68NJ00D 68nH  [MURATA_LQW_0603]  82.73,31.37 270 top
L11  LQH32PN1R5NN0L  [L3225M]  43.46,27.86 0 top
L12  LQH32PN1R5NN0L  [L3225M]  65.48,51.54 270 top
L13  GLFR1608T220M-LR_22uH  [0603]  33.17,29.86 180 top
L14  TCCH-80+  [TCCH-80+]  42.67,88.06 90 top
L15  TCCH-80+  [TCCH-80+]  31.45,53.95 270 top
L16  LQH32PN1R5NN0L  [L3225M]  32,92 0 top
L17  [0603]  195.45,37.01 90 top
L18  LQW18AN68NJ00D 68nH  [MURATA_LQW_0603]  82.68,35.97 90 top
L19  [0603]  151.04,78.56 270 top
L20  22uH_744053220  [POWER-CHOKE_WE-TPC]  132.11,29.29 0 top
L21  SRR6038-100Y 10uH  [POWER-CHOKE_WE-TPC]  188.8,52.12 90 top
L22  LQH32PN1R5NN0L  [L3225M]  165.99,41.48 90 top
L23  LQH32PN1R5NN0L  [L3225M]  75.69,71.98 270 top
L24  LQH32PN1R5NN0L  [L3225M]  111.18,33.5 180 top
L25  LQH32PN1R5NN0L  [L3225M]  27.41,49.48 90 top
L26  6.8nH  [MURATA_LQW_0603]  47.32,85.9 90 top
L27  ferrite_30ohm  [0603]  19.08,92.18 90 top
L28  6.8nH  [MURATA_LQW_0603]  46.61,82.22 0 top
L29  LQH32PN1R5NN0L  [L3225M]  81.84,94.87 180 top
L30  6.8nH  [MURATA_LQW_0603]  72.31,91.59 0 top
L31  6.8nH  [MURATA_LQW_0603]  74.14,89.79 270 top
L32  LQW18AN68NJ00D 68nH  [MURATA_LQW_0603]  42.34,42.27 0 top
L33  LQW18AN68NJ00D 68nH  [MURATA_LQW_0603]  37.72,42.27 180 top
L34  ferrite_30ohm  [0603]  142.49,101.68 270 top
L35  ferrite_30ohm  [0603]  205.69,108.23 180 top
L36  ferrite_30ohm  [0603]  152.98,98.91 0 top
L37  ferrite_30ohm  [0603]  193.65,108.38 180 top
R1  49.9  [R0603]  168.45,88.9 180 top
R2  12.1k  [R0603]  202.29,35.87 90 top
R3  49.9  [R0603]  168.45,86.89 180 top
R4  49.9  [R0603]  168.35,90.86 180 top
R5  12.1k  [R0603]  203.81,30 270 top
R6  15  [R0402]  39.4,33.63 270 top
R7  22  [R0603_COMPACT]  46.38,32.18 180 top
R8  22  [R0603_COMPACT]  46.38,33.48 180 top
R9  zero_ohm  [R0603]  62.08,67.84 0 top
R10  DNP  [R0603]  59.87,66.98 90 top
R11  DNP  [R0603]  64.31,66.98 90 top
R12  22  [R0603_COMPACT]  46.38,34.72 180 top
R13  22  [R0603_COMPACT]  46.56,36.45 180 top
R14  270  [R0603]  115.54,92.28 0 top
R15  270  [R0603]  218.85,73.79 180 top
R16  270  [R0603]  102.29,88.47 0 top
R17  470  [R0402]  38.07,29.92 180 top
R18  470  [R0402]  30.76,29.24 90 top
R19  470  [R0402']  171.42,70.26 0 top
R20  4.99k  [R0402]  214.38,50.01 90 top
R21  4.99k  [R0402]  219.89,53.24 0 bottom
R22  15  [R0402']  181.1,87.43 180 top
R23  49.9  [R0603]  168.3,92.86 180 top
R24  270  [R0603]  197.41,95.78 180 top
R25  270  [R0603]  197.38,87.38 180 top
R26  12.1k  [R0603]  168.25,94.49 0 top
R27  15  [R0402']  181.1,88.29 180 top
R28  DNP  [R0603]  164.21,51.74 90 top
R29  15  [R0402']  181.89,93.02 180 top
R30  4.99k  [R0402]  103.58,86.08 0 top
R31  15  [R0402]  74.02,34.16 180 top
R32  470  [R0402]  70.18,35 90 top
R33  470  [R0402]  69.04,41.3 0 top
R34  15  [R0402']  181.89,93.8 180 top
R35  22  [R0603_COMPACT]  74.63,26.9 90 top
R36  22  [R0603_COMPACT]  75.84,26.9 90 top
R37  470  [R0402']  209.07,26.37 180 top
R38  470  [R0402']  203.81,35.05 180 top
R39  22  [R0603_COMPACT]  77.09,26.92 90 top
R40  22  [R0603_COMPACT]  78.31,26.92 90 top
R41  15  [R0402']  146.76,92.79 180 top
R42  4.99k  [R0402]  102.29,87.12 0 top
R43  15  [R0402']  146.74,90.93 180 top
R44  4.99k  [R0402]  99.97,77.29 0 top
R45  4.99k  [R0402]  102.24,77.29 0 top
R46  4.99k  [R0402]  116.87,89.92 0 top
R47  4.99k  [R0402]  115.54,81.1 0 top
R48  4.99k  [R0402]  113.18,81.1 0 top
R49  15  [R0402']  147.83,88.04 180 top
R50  4.99k  [R0402]  115.54,90.96 0 top
R51  90.9  [R0402]  96.98,37.39 90 top
R52  90.9  [R0402]  95.76,37.39 270 top
R53  90.9  [R0402]  108.51,37.47 90 top
R54  90.9  [R0402]  109.65,37.47 270 top
R55  90.9  [R0402]  111.96,51.59 90 top
R56  12.1k  [R0603]  176.12,74.91 270 top
R57  470  [R0402']  190.27,35.48 180 top
R58  470  [R0402']  190.27,34.57 180 top
R59  470  [R0402']  190.27,33.61 180 top
R60  470  [R0402']  190.27,32.69 180 top
R61  15  [R0402']  161.57,85.5 90 top
R62  90.9  [R0402]  110.72,51.59 270 top
R63  zero_ohm  [R1206]  13.03,80.34 0 top
R64  15  [R0402']  162.46,87.15 90 top
R65  15  [R0402']  160.3,94.82 90 top
R66  15  [R0402']  163.63,87.43 90 top
R67  DNP  [R1206]  12.95,78.06 0 top
R68  15  [R0402']  19.56,102.34 90 top
R69  15  [R0402']  21.16,104.37 90 top
R70  15  [R0402']  22.28,101.32 90 top
R71  15  [R0402']  32.41,102.9 0 top
R72  15  [R0402']  36.68,103.51 0 top
R73  15  [R0402']  42.95,101.32 0 top
R74  15  [R0402']  25.86,101.32 90 top
R75  12.1k  [R0603]  154.91,86.79 0 top
R76  12.1k  [R0603]  160.4,85.45 90 top
R77  12.1k  [R0603]  154.89,91.8 0 top
R78  15  [R0402']  161.09,94.82 90 top
R79  15  [R0402]  57.05,45.95 270 top
R80  15  [R0402]  59.82,45.95 270 top
R102  12.1k  [R0603]  154.91,84.89 0 top
R103  12.1k  [R0603]  154.89,90.04 0 top
R104  12.1k  [R0603]  154.86,88.44 180 top
R105  12.1k  [R0603]  168.25,96.09 0 top
SW7  45X45MM_TL3315  [PBUT_SW_TACTILE_4_5MMX4_5MM]  185.27,70.11 0 top
TP1  PTR1TP08R  [TP08R]  162.92,52.27 0 top
U1  LTC6241CS8#TRPBF  [SO08]  96.88,91.57 270 top
U2  LTC6948IUFD-1#PBF  [QFN28_NONSQ]  78.31,33.61 0 top
U3  ADL5536ARKZ-R7  [SOT89]  37.39,88.57 0 top
U4  HMC636  [SOT89]  36.5,52.66 90 top
U6  LTC6948IUFD-3#PBF  [QFN28_NONSQ]  40.06,37.82 90 top
U7  CS4344  [MSOP10]  195.12,33.78 270 top
U8  SYM-63LH+  [SYM-18H]  65.91,79.38 90 top
U9  STM32H743ZIT6  [STM32F407_144]  158.32,64.97 270 top
U10  ADL5536ARKZ-R7  [SOT89]  84.18,67.87 270 top
U11  LTC5586  [QFN32]  102.69,44.55 180 top
U12  ADP7156ARDZ-3.3-R7  [SO8]  139.06,35.51 0 top
U13  LTC1564  [SSOP16]  117.14,72.67 90 top
U14  LTC1564  [SSOP16]  102.24,72.44 90 top
U15  LTC6241CS8#TRPBF  [SO08]  102.24,81.69 180 top
U16  LTC6241CS8#TRPBF  [SO08]  115.57,85.57 180 top
U17  LTC6910-1ITS8#TRMPBF  [TSOT-23-8]  117.04,67.06 270 top
U18  LAN8742  [QFN-24]  161.37,91.21 180 top
U19  LTC6910-1ITS8#TRMPBF  [TSOT-23-8]  100.05,66.83 270 top
U20  MCP1826ST-3302E/DB  [SOT223]  174.93,39.96 180 top
U21  HMC636  [SOT89]  61.93,94.49 0 top
U23  MCP1826ST-3302E/DB  [SOT223]  149.76,104.06 0 top
U24  MCP1826ST-3302E/DB  [SOT223]  198.12,104.78 180 top
U25  PE43712SMD  [QFN32']  22.99,86.97 0 top
X1  25MHz  [ECS-250-20-30B-DU_CRYSTAL]  161.26,97.49 0 top
X2  8MHZ  [ECS-250-20-30B-DU_CRYSTAL]  158.83,79.38 180 top
X3  DV75C-010.0M  [CWX8XX_5MM_7MM]  59.82,52.25 180 top
Z1  CD143A-SR05  [SR2.8.TCT_1PRIMARY]  191.03,87.81 90 top
Z2  CD143A-SR05  [SR2.8.TCT_1PRIMARY]  191.13,92.86 90 top
Z4  CD143A-SR05  [SR2.8.TCT_1PRIMARY]  206.68,57.15 270 top

## Library data of the parts
BAL1 = tdk
C1-C4 C6-C10 C12-C15 C17-C20 C22-C32 C34 C36-C46 C48-C52 C57 C60-C62 C68-C70 C81-C84 C93 C95 C97 C103 C104 C112-C114 C117-C120 C123 C124 C127 C130-C142 C144-C152 C157 C158 C163 C164 C168 C169 J3 R7 R8 R12 R13 R35 R36 R39 R40 = m64library
C5 C21 C63-C67 C128 C129 C166 R1-R6 R9-R11 R14-R18 R20 R21 R23-R26 R28 R30-R33 R42 R44-R48 R50-R56 R62 R75-R77 R79 R80 R102-R105 = misc9
C11 C16 C156 C167 C170 C171 C179 C180 C184 C185 = misc6
C33 C35 C53-C56 C58 C59 C76 C80 C99 C106 C111 C115 C116 C121 C122 C125 C126 C143 C153 C154 C159-C161 C172-C178 C181 = nelson_vrs
C47 C85-C92 C94 C96 C98 C101 C105 C108 = misclib4
C71-C74 C78 C79 C107 C109 C110 J2 R19 R22 R27 R29 R34 R37 R38 R41 R43 R49 R57-R61 R64-R66 R68-R74 R78 = misclib3
C75 C77 C182 C183 F1 F2 R63 R67 = resistor
C100 C102 C155 C162 C165 = misc5
D1-D4 D20 = 195_est_library
D5 D6 = misc1
D8 JP1 JP2 = pinhead
FAB1-FAB6 = rf_shield_pn_2118724
FB14 = api_delevan_ferrite
FID1-FID4 U9 = misclib2
FLT1 FLT3 FLT5 = 0868lp15a020
FLT2 FLT4 = murata_saw
H1-H6 = holes
J1 = con-stewart; OC_FARNELL: unknown; OC_NEWARK: unknown
J4 J10 J11 = amp_ufl
J5 = GCT_usb4085
J8 = connector
L1-L3 L5 L10 L18 L20 L21 L26 L28 L30-L33 = rcl
L4 L13 L17 L19 L27 L34-L37 = wuerth-elektronik
L6 L7 L14 L15 = tcch-80+
L8 L9 L11 L12 L16 L22-L25 L29 = rcl; PARTNUMBER: ELJ-PA331KF
SW7 = e-switch_tactile
TP1 = testpad
U1 U15 U16 = linear
U2 U6 = ltc6948_synth
U3 U4 U10 U21 = rfmd_sot89
U7 = cirrus-3
U8 = minicircuits
U11 = ltc5586
U12 = analog_devices
U13 U14 = ltc1564
U17 U19 = ltc6910
U18 = lan8742
U20 U23 U24 = linear-technology; MPN: LT1129CST-5#PBF; OC_FARNELL: 1663375; OC_NEWARK: 57M2069
U25 = peregrine
X1 X2 = ecs_crystal
X3 = connor_winfield
Z1 Z2 Z4 = misc8

## Nets
3V3: C85.1 C86.1 C87.1 C88.1 C89.1 C90.1 C91.1 C92.1 C94.1 C96.1 C98.1 C101.1 C120.1 C178.A D8.3 J8.1 JP2.1 L17.2 L22.1 R15.2 R28.1 R56.1 U9.6 U9.17 U9.30 U9.39 U9.52 U9.62 U9.72 U9.84 U9.95 U9.108 U9.121 U9.131 U9.143 U9.144
3V3_VIN: C119.1 C121.A L22.2 U20.3
3V3A: C26.1 C28.1 C32.1 C33.A C43.1 C44.1 C45.1 C50.1 C58.A C59.A C62.1 C95.1 C97.1 C103.1 C136.1 C137.1 C138.1 C141.1 C142.1 C148.1 C150.2 C151.2 C154.A C181.A C183.1 L10.2 L12.1 L18.2 L19.1 L20.2 L32.2 L33.2 R55.2 U1.8 U2.8 U2.9 U2.13 U2.27 U6.8 U6.9 U6.13 U6.27 U11.24 U13.13 U13.14 U14.13 U14.14 U15.8 U16.8 U17.8 U19.8
20MHZ_REF: C21.2 U9.23 X2.1
!RESET: C47.1 J8.3 JP1.5 R56.2 SW7.1 SW7.2 U9.25 U18.15
+5V: C108.A F1.2 L21.1
+5V_ATTEN: C11.1 C16.1 L27.1 U25.2
+5V_FUSE: C54.A C56.A C76.A C106.A C116.A C122.A C125.A C153.A C155.A C156.1 C176.A F1.1 L9.1 L11.1 L16.1 L23.1 L24.1 L25.1 L27.2 L29.1 R67.1 U12.4 U12.8 U20.1
+5V_FUSE_MIXER2: C143.A C144.1 C145.2 C146.1 C147.2 L24.2 U11.5 U11.18
+5V_FUSE_SYNTH1: C31.1 C41.1 C42.1 C55.A L11.2 R6.2 U6.23
+5V_FUSE_SYNTH2: C23.1 C24.1 C25.1 C126.A L9.2 R31.2 U2.23
ADC1_IN2_N [differential]: R47.2 U9.50 U16.7
ADC1_IN2_P [differential]: R46.2 U9.49 U16.1
ADC2_IN2_N [differential]: R45.2 U9.54 U15.7
ADC2_IN2_P [differential]: R30.2 U9.53 U15.1
ADC3_INP0: U1.6 U1.7 U9.28
ADC123_INP6: U1.1 U1.2 U9.22
AGC_NB_I: U1.5 U13.16 U17.1
AGC_NB_Q: U1.3 U14.16 U19.1
ATTEN_LE: R74.2 U9.70
AUDIO_LEFT: C79.1 J2.R R38.1
AUDIO_RIGHT: C78.1 J2.L R37.1
BALUN_N [differential]: BAL1.4 C140.2
BALUN_P [differential]: BAL1.3 C139.2
BB_AGND: C80.A C81.1 C83.1 C117.1 C118.1 C159.A C160.A C161.A U13.15 U14.15 U15.5 U16.5 U17.2 U19.2
BOOT0: JP2.2 R19.1 U9.138
D0: C167.1 R68.1 U25.31
D1: C170.1 R69.1 U25.30
D2: C171.1 R70.1 U25.29
D3: C179.1 R71.1 U25.28
D4: C180.1 R72.1 U25.27
D5: C184.1 R73.1 U25.26
DATA_0: R68.2 U9.55 U13.8 U14.8
DATA_1: R69.2 U9.56 U13.7 U14.7
DATA_2: R70.2 U9.57 U13.6 U14.6
DATA_3: R71.2 U9.63 U13.5 U14.5
DATA_4: R72.2 U9.48
DATA_5: R73.2 U9.64
ETH_3V3A: C63.1 C65.1 C172.A L36.2 R75.1 R76.1 R77.1 R102.1 R103.1 U18.1 U18.9 U18.19
ETH_3V3B: C64.1 C165.A C166.1 C174.A J1.2 J1.5 L37.2 R1.1 R3.1 R4.1 R23.1 Z1.4 Z2.4
ETH_RMII_REF_CLK: R49.2 U9.35
ETH_RX_N [differential]: J1.6 R29.1 Z2.2
ETH_RX_P [differential]: J1.4 R34.1 Z2.3
ETH_TX_N [differential]: J1.3 R22.1 Z1.2
ETH_TX_P [differential]: J1.1 R27.1 Z1.3
ETH_VIN: F2.1 L34.1 L35.1
ETHPHY_RX_N [differential]: R4.2 R29.2 U18.22
ETHPHY_RX_P [differential]: R23.2 R34.2 U18.23
ETHPHY_TX_N [differential]: R3.2 R22.2 U18.20
ETHPHY_TX_P [differential]: R1.2 R27.2 U18.21
F_LRCLK: R59.2 U9.73
F_MCLK: R60.2 U9.96
F_SCLK: R58.2 U9.74
F_SDIN: R57.2 U9.76
FLT_CS: U9.69 U13.4 U14.4
GND: BAL1.2 BAL1.5 C1.1 C2.1 C4.1 C5.1 C6.1 C7.2 C11.2 C12.1 C13.1 C14.2 C16.2 C17.2 C19.2 C20.2 C21.1 C22.2 C23.2 C24.2 C25.2 C26.2 C28.2 C31.2 C32.2 C33.C C34.1 C35.C C36.2 C37.2 C38.2 C39.2 C41.2 C42.2 C43.2 C44.2 C45.2 C46.2 C47.2 C48.2 C49.2 C50.2 C52.2 C53.C C54.C C55.C C56.C C57.2 C58.C C59.C C62.2 C63.2 C64.2 C65.2 C66.2 C67.2 C68.2 C69.2 C70.2 C71.2 C72.2 C73.1 C74.2 C76.C C78.2 C79.2 C80.C C81.2 C82.1 C83.2 C85.2 C86.2 C87.2 C88.2 C89.2 C90.2 C91.2 C92.2 C94.2 C95.2 C96.2 C97.2 C98.2 C99.C C100.C C101.2 C102.C C103.2 C105.C C106.C C107.2 C108.C C109.2 C110.2 C111.C C113.1 C114.2 C115.C C116.C C117.2 C118.2 C119.2 C120.2 C121.C C122.C C123.2 C124.2 C125.C C126.C C127.1 C128.1 C129.1 C130.1 C131.2 C132.2 C133.1 C134.1 C135.2 C136.2 C137.2 C138.2 C141.2 C142.2 C143.C C144.2 C145.1 C146.2 C147.1 C148.2 C149.2 C150.1 C151.1 C153.C C154.C C155.C C156.2 C157.2 C159.C C160.C C161.C C162.C C163.1 C164.1 C165.C C166.2 C167.2 C169.2 C170.2 C171.2 C172.C C173.C C174.C C175.C C176.C C177.C C178.C C179.2 C180.2 C181.C C182.2 C183.2 C184.2 C185.2 D1.C D2.A D3.C D4.A D5.C D6.A D8.2 FAB1.P$1 FAB1.P$2 FAB1.P$3 FAB1.P$4 FAB1.P$5 FAB1.P$6 FAB1.P$7 FAB1.P$8 FAB1.P$9 FAB1.P$10 FAB1.P$11 FAB1.P$12 FAB1.P$13 FAB1.P$14 FAB1.P$15 FAB1.P$16 FAB1.P$17 FAB1.P$18 FAB1.P$19 FAB1.P$20 FAB1.P$21 FAB1.P$22 FAB1.P$23 FAB1.P$24 FAB2.P$1 FAB2.P$2 FAB2.P$3 FAB2.P$4 FAB2.P$5 FAB2.P$6 FAB2.P$7 FAB2.P$8 FAB2.P$9 FAB2.P$10 FAB2.P$11 FAB2.P$12 FAB2.P$13 FAB2.P$14 FAB2.P$15 FAB2.P$16 FAB2.P$17 FAB2.P$18 FAB2.P$19 FAB2.P$20 FAB2.P$21 FAB2.P$22 FAB2.P$23 FAB2.P$24 FAB3.P$1 FAB3.P$2 FAB3.P$3 FAB3.P$4 FAB3.P$5 FAB3.P$6 FAB3.P$7 FAB3.P$8 FAB3.P$9 FAB3.P$10 FAB3.P$11 FAB3.P$12 FAB3.P$13 FAB3.P$14 FAB3.P$15 FAB3.P$16 FAB3.P$17 FAB3.P$18 FAB3.P$19 FAB3.P$20 FAB3.P$21 FAB3.P$22 FAB3.P$23 FAB3.P$24 FAB4.P$1 FAB4.P$2 FAB4.P$3 FAB4.P$4 FAB4.P$5 FAB4.P$6 FAB4.P$7 FAB4.P$8 FAB4.P$9 FAB4.P$10 FAB4.P$11 FAB4.P$12 FAB4.P$13 FAB4.P$14 FAB4.P$15 FAB4.P$16 FAB4.P$17 FAB4.P$18 FAB4.P$19 FAB4.P$20 FAB4.P$21 FAB4.P$22 FAB4.P$23 FAB4.P$24 FAB5.P$1 FAB5.P$2 FAB5.P$3 FAB5.P$4 FAB5.P$5 FAB5.P$6 FAB5.P$7 FAB5.P$8 FAB5.P$9 FAB5.P$10 FAB5.P$11 FAB5.P$12 FAB5.P$13 FAB5.P$14 FAB5.P$15 FAB5.P$16 FAB5.P$17 FAB5.P$18 FAB5.P$19 FAB5.P$20 FAB5.P$21 FAB5.P$22 FAB5.P$23 FAB5.P$24 FAB6.P$1 FAB6.P$2 FAB6.P$3 FAB6.P$4 FAB6.P$5 FAB6.P$6 FAB6.P$7 FAB6.P$8 FAB6.P$9 FAB6.P$10 FAB6.P$11 FAB6.P$12 FAB6.P$13 FAB6.P$14 FAB6.P$15 FAB6.P$16 FAB6.P$17 FAB6.P$18 FAB6.P$19 FAB6.P$20 FAB6.P$21 FAB6.P$22 FAB6.P$23 FAB6.P$24 FLT1.1 FLT1.3 FLT1.5 FLT1.7 FLT2.1 FLT2.3 FLT2.4 FLT2.6 FLT3.1 FLT3.3 FLT3.5 FLT3.7 FLT4.1 FLT4.3 FLT4.4 FLT4.6 FLT5.1 FLT5.3 FLT5.5 FLT5.7 J1.8 J1.S1 J1.S2 J2.G J3.GND@1 J3.GND@2 J3.GND@3 J3.GND@4 J4.1 J4.2 J4.3 J5.A1 J5.A12 J5.B1 J5.B12 J5.GND@1 J5.GND@2 J5.GND@3 J5.GND@4 J8.5 J10.1 J10.2 J10.3 J11.1 J11.2 J11.3 JP1.3 R2.2 R5.2 R10.1 R11.1 R19.2 R20.1 R21.1 R24.2 R25.2 R26.2 R51.1 R52.2 R53.1 R54.2 R62.1 R63.1 R104.2 R105.2 SW7.3 SW7.4 U1.4 U2.10 U2.17 U2.21 U2.24 U2.GPAD U3.2 U3.2@1 U4.2 U4.2@1 U6.10 U6.17 U6.21 U6.24 U6.GPAD U7.8 U8.4 U8.5 U8.6 U9.16 U9.31 U9.34 U9.38 U9.51 U9.61 U9.83 U9.94 U9.107 U9.120 U9.130 U10.2 U10.2@1 U11.1 U11.8 U11.GPAD U12.GPAD U13.2 U13.3 U13.9 U13.10 U13.11 U13.12 U14.2 U14.3 U14.9 U14.10 U14.11 U14.12 U15.4 U16.4 U17.4 U18.GP U19.4 U20.2 U20.4 U21.2 U21.2@1 U23.2 U23.4 U24.2 U24.4 U25.1 U25.3 U25.4 U25.5 U25.6 U25.8 U25.9 U25.10 U25.11 U25.12 U25.13 U25.14 U25.15 U25.16 U25.17 U25.19 U25.20 U25.21 U25.22 U25.24 U25.25 U25.32 U25.33 X1.GND@1 X1.GND@2 X2.GND@1 X2.GND@2 X3.2 Z1.1 Z2.1 Z4.1
IF_1583MHZ: C8.2 U11.2
IFI_N [differential]: R54.1 U11.26
IFI_P [differential]: R53.2 U11.25 U17.3
IFQ_N [differential]: R52.1 U11.15
IFQ_P [differential]: R51.2 U11.16 U19.3
LE: C185.1 R74.1 U25.23
LED1: J1.A1 U18.3
LED2_!INTSEL: J1.A2 R105.1 U18.2
LO_N [differential]: C2.2 C104.1 U11.20
LO_P [differential]: C1.2 C112.1 U11.19
MC02_SYSCLK: TP1.TP U9.99
MCU_SPI3_MISO: R13.1 R40.1 U9.112 U11.21
MCU_SPI3_MOSI: R12.1 R39.1 U9.113 U11.22
MCU_SPI3_SCLK: R8.1 R36.1 U9.111 U11.23
MIXER_CS: U9.66 U11.17
N$1: C152.2 FLT4.2
N$2: C84.2 L14.1 U3.3
N$3: C18.1 U2.1
N$4: C17.1 U2.28
N$5: C82.2 C111.A C113.2 C114.1 L8.1 L23.2
N$7: C19.1 U2.16 U2.18 U2.19 U2.20
N$8: C20.1 U2.22
N$9: C22.1 U2.14
N$10: R31.1 U2.25
N$11: C57.1 U2.7
N$12: C68.1 R32.1 U2.26
N$14: C60.1 D3.A D4.C L26.2
N$16: C70.1 R33.1
N$17: C69.1 L4.2 R33.2 U2.15
N$18: C27.2 L15.1 U4.3
N$19: L4.1 R32.2
N$20: J5.B5 R21.2
N$22: R35.2 U2.3
N$23: R36.2 U2.4
N$24: R39.2 U2.5
N$25: C182.1 L19.2 U9.32 U9.33
N$26: C77.2 U7.10
N$27: R60.1 U7.4
N$28: R40.2 U2.6
N$29: R59.1 U7.3
N$30: C102.A U9.106
N$31: C29.1 J10.RF
N$32: C30.1 J11.RF
N$34: R58.1 U7.2
N$35: C100.A U9.71
N$36: C15.1 FLT2.5
N$37: D20.1 U9.1
N$38: D8.1 U9.2
N$39: C3.2 FLT2.2
N$41: D20.2 R15.1
N$43: R57.1 U7.1
N$44: C51.1 U4.1
N$45: C15.2 U10.1
N$46: C173.A L34.2 U23.1
N$47: C9.1 U6.1
N$48: C27.1 R9.1 R10.2
N$49: C61.2 R9.2 R11.2
N$50: C4.2 C6.2 C7.1 C53.A L14.3 L16.2
N$51: C73.2 U7.6
N$52: C8.1 FLT4.5
N$53: C71.1 C72.1 U7.5
N$54: C75.2 U7.7
N$56: C75.1 R5.1 R37.2
N$57: C77.1 R2.1 R38.2
N$58: FLT1.8 U25.18
N$61: C99.A C163.2 C164.2 L6.3 L29.2
N$64: C37.1 U6.28
N$66: C74.1 L17.1 U7.9
N$67: C36.1 U6.16 U6.18 U6.19 U6.20
N$68: C177.A L20.1 U12.1 U12.2
N$73: C38.1 U6.22
N$74: C109.1 U12.5 U12.6
N$75: C39.1 U6.14
N$76: C110.1 U12.7
N$77: C107.1 C162.A U12.3
N$78: R6.1 U6.25
N$79: C48.1 U6.7
N$80: C46.1 R17.1 U6.26
N$81: C61.1 U8.2
N$82: C93.1 U3.1
N$83: R47.1 R48.2 U16.6
N$85: R30.1 R42.2 U15.2
N$86: R44.2 R45.1 U15.6
N$87: BAL1.1 C51.2
N$88: C52.1 R18.1
N$89: C49.1 L13.2 R18.2 U6.15
N$90: L13.1 R17.2
N$91: R16.1 R42.1 R44.1 U15.3
N$92: R16.2 U14.1
N$93: C93.2 D1.A D2.C FLT1.4
N$94: R14.2 U13.1
N$96: R26.1 U18.24
N$97: R7.2 U6.3
N$98: C66.1 C67.1 U18.6
N$99: J1.C2 R24.1
N$100: J1.C1 R25.1
N$101: R8.2 U6.4
N$102: R12.2 U6.5
N$103: R13.2 U6.6
N$105: C34.2 C35.A L12.2 X3.4
N$106: C3.1 U8.3
N$107: C157.1 L26.1 L28.2
N$109: R46.1 R50.2 U16.2
N$110: R14.1 R48.1 R50.1 U16.3
N$113: FLT3.4 L28.1
N$114: R78.1 U18.4
N$115: R65.1 U18.5
N$119: C105.A FB14.P$2 L21.2
N$120: C130.2 L2.1 U11.10
N$121: L7.1 R63.2 R67.2
N$122: J5.A5 R20.2
N$127: C123.1 L1.2 U11.9
N$128: C127.2 L2.2 U11.12
N$129: C124.1 L1.1 U11.13
N$130: C133.2 L5.2 U11.31
N$131: C132.1 L3.1 U11.32
N$132: C131.1 L3.2 U11.28
N$133: C134.2 L5.1 U11.29
N$134: C135.1 C149.1 R55.1 R62.2 U11.6
N$136: C152.1 L8.2 U10.3
N$137: C84.1 FLT3.8
N$138: C158.1 J4.RF
N$144: C60.2 U21.1
N$145: C168.1 L6.1 U21.3
N$146: C40.1 U8.1
N$147: FLT5.4 L30.1
N$148: C169.1 L30.2 L31.1
N$149: C168.2 FLT5.8
N$151: C40.2 L31.2
N$188: C10.1 U25.7
N$195: C10.2 D5.A D6.C J3.RF L7.3
N$196: C175.A L35.2 U24.1
N$197: L37.1 U24.3
N$198: L36.1 U23.3
N$203: R78.2 X1.3
N$204: R65.2 X1.1
N$205: C9.2 R79.2
N$206: C18.2 R80.2
N$999: C12.2 C13.2 C14.1 C115.A L15.3 L25.2
POSTMIX_GAIN0: U9.60 U17.5 U19.5
POSTMIX_GAIN1: U9.59 U17.6 U19.6
POSTMIX_GAIN2: U9.58 U17.7 U19.7
REF_10MHZ: R79.1 R80.1 X3.3
REF_CLK: R49.1 R76.2 U18.14
RF_SW: U9.65 U11.4
RMII_MDC: U9.27 U18.13
RMII_MDIO: R102.2 U9.36 U18.12
RMII_RX_DV: R75.2 U9.43 U18.11
RMII_RXD_0: R43.2 U9.44
RMII_RXD_1: R41.2 U9.45
RMII_TXD_0: R64.1 U9.128
RMII_TXD_1: R66.1 U9.129
RMII_TXD_EN: R61.1 U9.126
RXD0: R43.1 R103.2 U18.8
RXD1: R41.1 R77.2 U18.7
RXER_ADDR0: R104.1 U18.10
SWCLK: J8.4 JP1.2 U9.109
SWDIO: J8.2 JP1.4 U9.105
SWO: J8.6 JP1.6 U9.133
SYNTH1_CS: R7.1 U9.67
SYNTH1_N [differential]: C140.1 L32.1 U6.11
SYNTH1_P [differential]: C139.1 L33.1 U6.12
SYNTH2_CS: R35.1 U9.68
SYNTH2_N [differential]: C104.2 L10.1 U2.11
SYNTH2_P [differential]: C112.2 L18.1 U2.12
TXD0: R64.2 U18.17
TXD1: R66.2 U18.18
TXEN: R61.2 U18.16
USB_N [differential]: J5.A7 J5.B7 U9.103 Z4.2
USB_P [differential]: J5.A6 J5.B6 R28.2 U9.104 Z4.3
VBUS: F2.2 FB14.P$1 J5.A4 J5.A9 J5.B4 J5.B9 Z4.4
X2: C5.2 U9.24 X2.3

## Tracks (layer width: path | path; a pad name or v marks a point on that pad's centre or on a via)
3V3  (via drill 0.25, 0.25 pad 0.25, 0.64)
  Top 0.152: J8.1 189.89,61.39 190.09,61.06 190.09,59.56 v190.02,59.36
  Top 0.203: 147.55,66.22 149.48,66.22 v149.81,66.55 | 146.79,72.72 146.63,72.72 146.61,72.7 146.13,72.7 C87.1 | 184.05,75.29 JP2.1 | v146.69,56.22 146.69,56.16 146.43,55.91 146.43,55.39 C90.1
  Top 0.254: U9.143 169.85,73.22 v170.18,73.23 170.7,73.28 C96.1 | U9.144 169.85,73.72 v169.85,73.74 170.1,73.99 C92.1 | U9.121 v169.85,62.22 v169.85,62.23 170.85,62.23 C94.1 | U9.131 169.85,67.22 v170.03,67.18 | U9.108 167.06,54.35 v167.06,53.44 167.21,53.29 C85.1 | U9.95 160.55,54.35 v160.55,53.44 C89.1 | U9.84 v155.07,53.44 155.09,53.42 C88.1 | U9.72 v146.69,56.22 v146.69,56.21 | U9.62 146.79,61.22 | 146.79,61.22 v146.79,61.24 | U9.52 147.55,66.22 146.45,66.22 146.28,66.4 145.91,66.4 C98.1 | U9.39 146.79,72.72 v146.58,72.72 | U9.30 v152.58,72.82 | 146.79,61.22 146.27,61.22 C101.1 | C91.1 v170.03,67.18 | 169.88,67.18 v170.03,67.18 | C86.1 159.13,76.56 159.08,76.51 U9.17 159.08,75.59 159.08,74.73 v158.75,74.4 | v217.12,73.76 217.15,73.79 R15.2 218,71.06 D8.3 | v163.22,51.16 163.94,51.16 R28.1 | U9.6 164.57,74.4 v165.02,74.09
  Top 0.406: R56.1 v175.13,75.69 | 184.05,75.29 216.28,75.29 217.12,74.45 v217.12,73.76 217.19,73.69 | L17.2 195.5,37.66 195.5,37.63
  Top 0.61: L17.2 193.61,37.71 C178.A | 195.5,37.63 v195.5,38.66 | L22.1 165.99,38.26 | 165.99,38.26 C120.1 166,37.3 165.96,37.26 | 165.99,38.26 166.84,38.26 v166.85,38.28
  Route2 0.305: 146.66,56.25 v146.69,56.22
  Route2 1.422: v165.96,37.29 165.96,37.39 v166.85,38.28 167.49,38.91 167.49,46.3 168.55,47.37 186.08,47.37 189.48,43.97 189.48,41.61 191.21,39.88 194.34,39.88 195.5,38.71 v195.5,38.66
  Route3 0.203: v149.81,66.55 150.09,66.55
  pour Route3 (isolate 0.381): 195.2,58.93 195.22,59.56 195.22,75.31 194.67,75.87 155.98,75.87 153.09,72.98 150.09,72.98 148.11,74.96 144.25,74.96 141.78,72.49 141.78,52.76 145.42,49.12 159.61,49.12 163.68,45.06 163.68,38.74 165.23,37.19 168.66,37.19 169.21,37.75 169.21,49.61 173.02,53.42 179.53,53.42 182.42,56.31 182.42,57.74 182.65,57.96 195.2,58.24
3V3_VIN
  Top 0.61: L22.2 165.99,44.51 C119.1
  Top 1.27: U20.3 169.83,43.05 C121.A
  Top 1.422: C121.A 166.19,43.08 L22.2
3V3A  (via drill 0.25, 0.64)
  Top 0.127: U2.13 81.24,34.35 81.36,34.47 81.36,35.42 C28.1 | U2.8 80.06,30.55 C50.1
  Top 0.152: C44.1 37.95,41.15 39.01,41.15 39.29,40.87 39.29,40.23 U6.13 | U11.24 104.44,41.79 104.62,41.61 105.68,41.61 C148.1
  Top 0.203: U2.27 75.34,32.85 C26.1 | U6.9 41.31,40.77 41.43,40.89 42.82,40.89 43,40.72 43,40.02 C32.1 | C43.1 40.81,34.52 v40.81,34.66 U6.27 | U2.9 81.13,32.35 81.25,32.23 81.25,30.89 v80.75,30.38 | v42.11,39.98 42.77,39.98 42.8,39.95
  Top 0.254: U6.8 42.31,39.57 42.7,39.95 42.8,39.95 43.06,39.95 C32.1
  Top 0.305: C148.1 v105.69,42.06
  Top 0.406: C45.1 43.08,42.31 L32.2 43,42.23 43,41.02 | 36.65,42.32 36.97,42.32 L33.2 37.89,41.4 C44.1 | C103.1 C95.1 82.74,30.68 L10.2 | L18.2 82.69,36.68 C97.1 C62.1 83.82,38.09 | 117.35,68.07 117.02,67.84 117.02,65.86 117.49,65.49 C142.1 118.8,65.2 119.02,64.97 119.02,42.24 120.12,41.15 v120.19,41.15 | 117.35,68.07 118.38,68.07 U17.8 | C141.1 100.65,64.91 100.23,65.33 100.23,67.62 100.46,67.84 101.38,67.84 U19.8 101.42,67.84 102.18,67.84 v102.39,68.05 | U14.13 97.76,72.14 | 97.76,72.14 97.68,72.14 C150.2 | 97.76,72.14 97.76,71.6 97.88,71.49 U14.14 99.91,71.49 v99.92,71.48 | U13.13 C151.2 112.62,71.83 112.74,71.72 U13.14 115.01,71.73 115.38,71.36 | U16.8 117.48,81.94 | U1.8 100.1,93.47 v101.83,93.47 | 115.38,71.36 115.72,71.02 115.72,69.5 116.31,68.91 116.99,68.91 117.35,68.56 117.35,68.07 | U15.8 104.12,79.06 104.12,78.44 104.21,78.34 104.75,78.34 104.81,78.4 104.83,78.4 v104.83,78.99 | v117.25,42.29 117.25,51.13 116.46,51.92 112.28,51.92 R55.2 | C28.1 81.73,35.72 L18.2 | C50.1 80.73,30.39 v80.75,30.38 | 82.75,30.64 L10.2 | v74.73,32.79 74.7,32.35 C26.1 | v115.65,71.81 115.65,71.63 115.38,71.36 | 43,40.02 43,41.02 | v82.73,37.34 82.7,36.69 L18.2 | v82.57,30.02 L10.2 | 37.95,41.15 38.12,41.15 v38.3,41.33 | v43.51,41.1 43.08,41.1 43,41.02
  Top 0.61: L19.1 151.01,80.47 C183.1 150.56,80.61 150.17,81 148.74,81 C181.A 147.57,82.17 | C33.A 99.85,95.73 99.95,95.63 99.95,93.63 100.1,93.47 | C58.A 118.04,81.38 117.48,81.94 | v108.28,83.72 106.96,83.72 C154.A
  Top 0.813: C137.1 C136.1 36.61,42.28 36.65,42.32 | C138.1 C45.1 | L12.1 65.51,52.91 65.58,52.91 65.58,52.96 65.58,54.46 v66.01,54.89 | v76,54.71 76,42.95 76.45,42.49 81.89,42.49 82.55,41.83 82.55,39.36 C62.1
  Top 1.016: 147.57,82.17 v147.37,82.8 | C58.A 120.8,81.38 v121.13,81.08 | v82.45,28.98 82.45,29.69 v82.57,30.02
  Top 1.422: v128.96,25.38 128.96,26.87 128.09,27.74 v120.35,27.74 120.32,27.74 119.48,28.58 119.48,32.82 119.51,32.84 | C59.A 68.27,52.96 65.58,52.96
  Route2 0.203: 120.22,33.76 v120.19,33.76 | 118.64,33.83 v118.64,33.78
  Route2 0.406: v120.19,41.15 120.22,41.12 120.22,33.76 | 104.85,79.02 v104.83,78.99 | 118.64,33.83 118.82,33.83 119.3,34.32 119.3,40.23 v117.25,42.29 | v82.57,30.02 82.47,30.38 v80.75,30.38 80.73,30.39 78.04,30.39 76.99,31.45 75.03,31.45 74.75,31.73 74.73,32.69 v74.73,32.79 | 75.82,54.89 v76,54.71 | v99.92,71.48 100.71,71.48 101.32,70.87 101.32,69.11 v102.39,68.05 108.66,68.05 110.16,69.55 114.3,69.55 115.09,70.33 115.09,71.25 v115.65,71.81
  Route2 0.61: v105.69,42.06 106.45,42.06 106.78,41.73 106.78,41.15 107.72,40.21 117.58,40.21 118.06,39.73 118.06,34.42 118.64,33.83 | 104.85,79.02 104.85,83.24 | 104.85,83.24 104.85,91.75 103.12,93.47 v101.83,93.47 | 104.85,83.24 107.8,83.24 v108.28,83.72
  Route2 0.813: v66.01,54.89 75.82,54.89
  Route2 1.016: v121.13,81.08 120.22,81.97 118.97,81.97 115.11,85.83 109.91,85.83 108.28,84.2 v108.28,83.72
  Route3 1.016: 129.44,82.25 129.34,82.35 127.56,82.35 125.17,79.96 122.23,79.96 v121.13,81.08 120.88,81.31
  Route3 1.27: v129.44,82.32 129.44,82.25 129.44,26.32 v130.38,25.38
  Bottom 0.203: v40.81,34.66 42.69,34.66 42.84,34.81 42.98,34.95 42.98,39.55 42.55,39.98 v42.11,39.98
  Bottom 0.305: 43.08,34.57 42.84,34.81
  Bottom 0.406: v82.57,30.02 82.65,30.15 82.73,30.79 v82.73,37.34 | v38.3,41.33 43.28,41.33 v43.51,41.1
  Bottom 0.61: v147.37,82.8 146.96,82.32
  Bottom 1.016: 146.96,82.32 v129.44,82.32 | v120.35,27.74 116.43,27.74 114.43,25.73 95.33,25.73 93.42,27.64 86.28,27.64 85.62,26.98 82.47,26.98 82.4,27.05 | 82.4,27.05 82.37,27.08 82.37,28.91 v82.45,28.98 | 82.4,27.05 82.4,25.6 80.95,24.16 77.37,24.16 75.87,22.66 73.63,22.66 73.38,22.91 73.38,27.43 73.05,27.76 46.91,27.76 46.48,28.19 46.48,31.27 45.69,32.06 43.76,32.06 43.46,32.36 43.46,34.19 43.08,34.57
  other vias: 131.78,25.38 133.2,25.4
  pour Top (no thermals): 135.38,28.17 135.38,25.05 135,24.66 128.47,24.66 128.07,24.87 128.07,28.32 128.52,28.58 134.98,28.58
  pour Top: 117.81,35.03 120.78,35.03 121.21,34.6 121.21,32.72 120.68,32.18 118.29,32.18 117.98,32.49 117.98,34.06 117.73,34.32 117.73,34.95
20MHZ_REF
  Top 0.203: U9.23 156.07,76.44 156.72,77.12 158.09,77.12 158.39,77.42 158.39,79.43 159.13,80.16 160.41,80.16 X2.1 160.87,80.48 161.54,80.72 162.15,80.71 C21.2
!RESET  (via drill 0.25, 0.38)
  Top 0.152: U9.25 155.07,76.45 154.84,76.68 154.51,76.68 154.41,76.78 154.41,81.38 v155.07,82.04 | v161.11,88.01 161.07,88.08 U18.15 | SW7.2 187.68,71.93 193.8,71.93 193.97,71.7 193.97,62.03 193.7,61.82 190.81,61.82 J8.3
  Top 0.203: v155.04,72.16 155.04,75.57 U9.25 | R56.2 176.23,73.95 176.23,71.86 176.89,71.2 v176.94,71.2 176.94,70.28 177.42,69.8 178.54,69.8 JP1.5
  Top 0.254: C47.1 176.42,74.36 R56.2 | v182.65,69.85 183.07,70.27 SW7.1
  Top 1.27: SW7.1 SW7.2
  Route2 0.203: v176.94,71.2 164.87,71.2 163.91,72.16 v155.04,72.16
  Route2 0.254: JP1.5 178.74,69.85 v182.65,69.85
  Route3 0.152: v155.07,82.04 161.04,88.01 v161.11,88.01
+5V
  Top 1.422: F1.2 183.44,49.43 C108.A
  pour Top (no thermals): 188.21,55.8 188.39,55.53 188.39,48.52 187.93,48.06 184.53,48.06 183.85,48.57 183.82,55.8
+5V_ATTEN
  Top 0.203: U25.2 C16.1 | 19.09,89.28 C11.1
  Top 0.61: C16.1 19.09,89.28 19.09,91.26 L27.1
+5V_FUSE  (via drill 0.25, 0.38, 0.64)
  Top 0.152: U12.4 140.97,33.78 v141.58,34.39 | v136.14,38 136.86,37.92 137.07,38 U12.8
  Top 0.203: v183.97,42.11 183.97,42.42 | 183.97,42.42 v184.25,42.7 | v183.97,42.11 184.56,42.11 v184.58,42.09 | v183.97,42.11 183.97,41.63 v184.07,41.53 | v183.97,42.11 183.64,42.11 v183.41,41.89 | 183.97,42.42 183.72,42.42 v183.57,42.57 | 136.86,37.92 136.86,38 v136.6,38.25 | v135.71,38.3 135.76,38.15 135.95,37.96 | 135.95,37.96 134.44,37.92 | v135.81,37.57 135.81,37.82 135.95,37.96
  Top 0.406: 67.87,26.92 67.87,28.8 68.1,29.03 67.97,29.03 L9.1 | 41.83,27.64 L11.1 | 28.83,92.39 28.83,92.63 C76.A 28.67,92.71 28.59,92.63
  Top 0.61: 75.53,73.55 L23.1 | 112.62,33.46 L24.1 | 67.87,26.92 67.79,26.85 67.79,26.77 67.79,26.24 C125.A | L27.2 18.51,92.65 v17.86,92.02